# EAGLE board SparkFun_GNSS_Timing-ZED-F9T-Panel (EAGLE 9.6.2), part 1 of 4
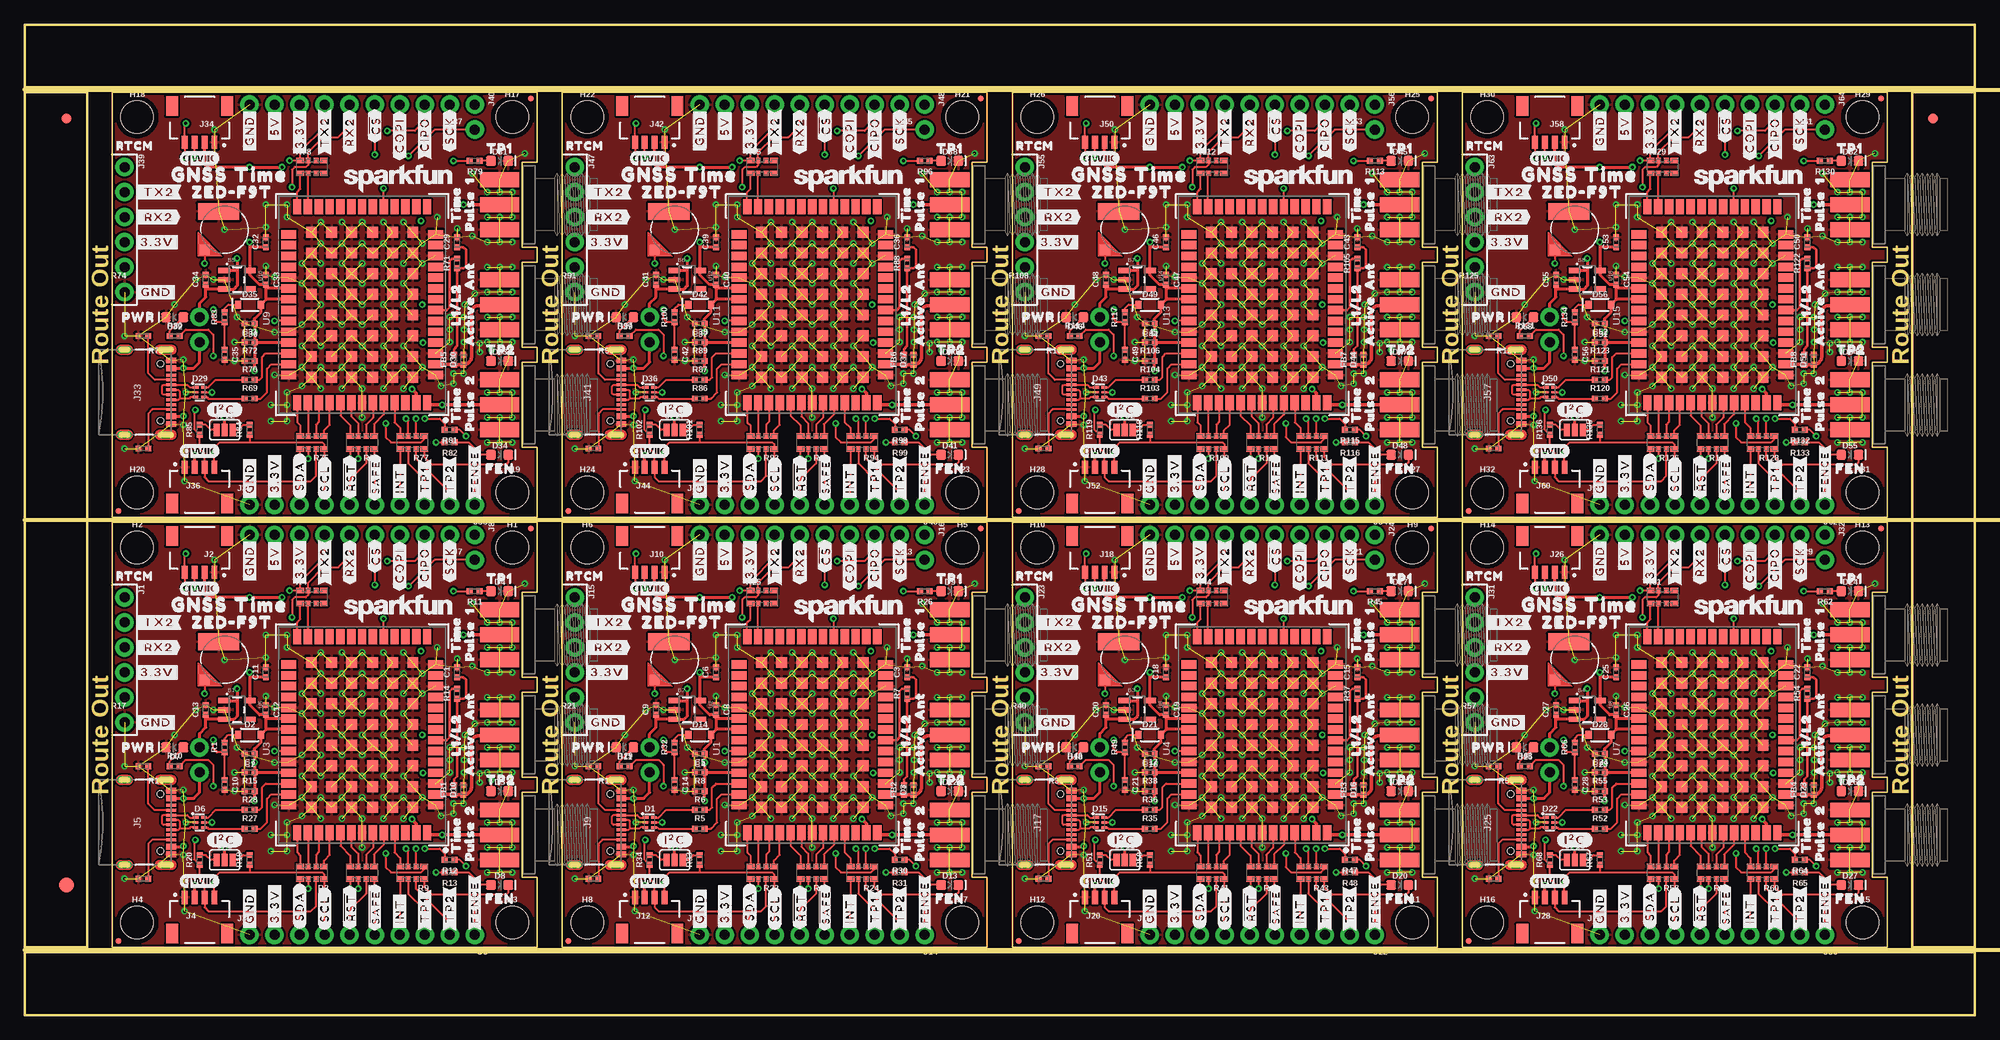
[diagram p0: board, top side]
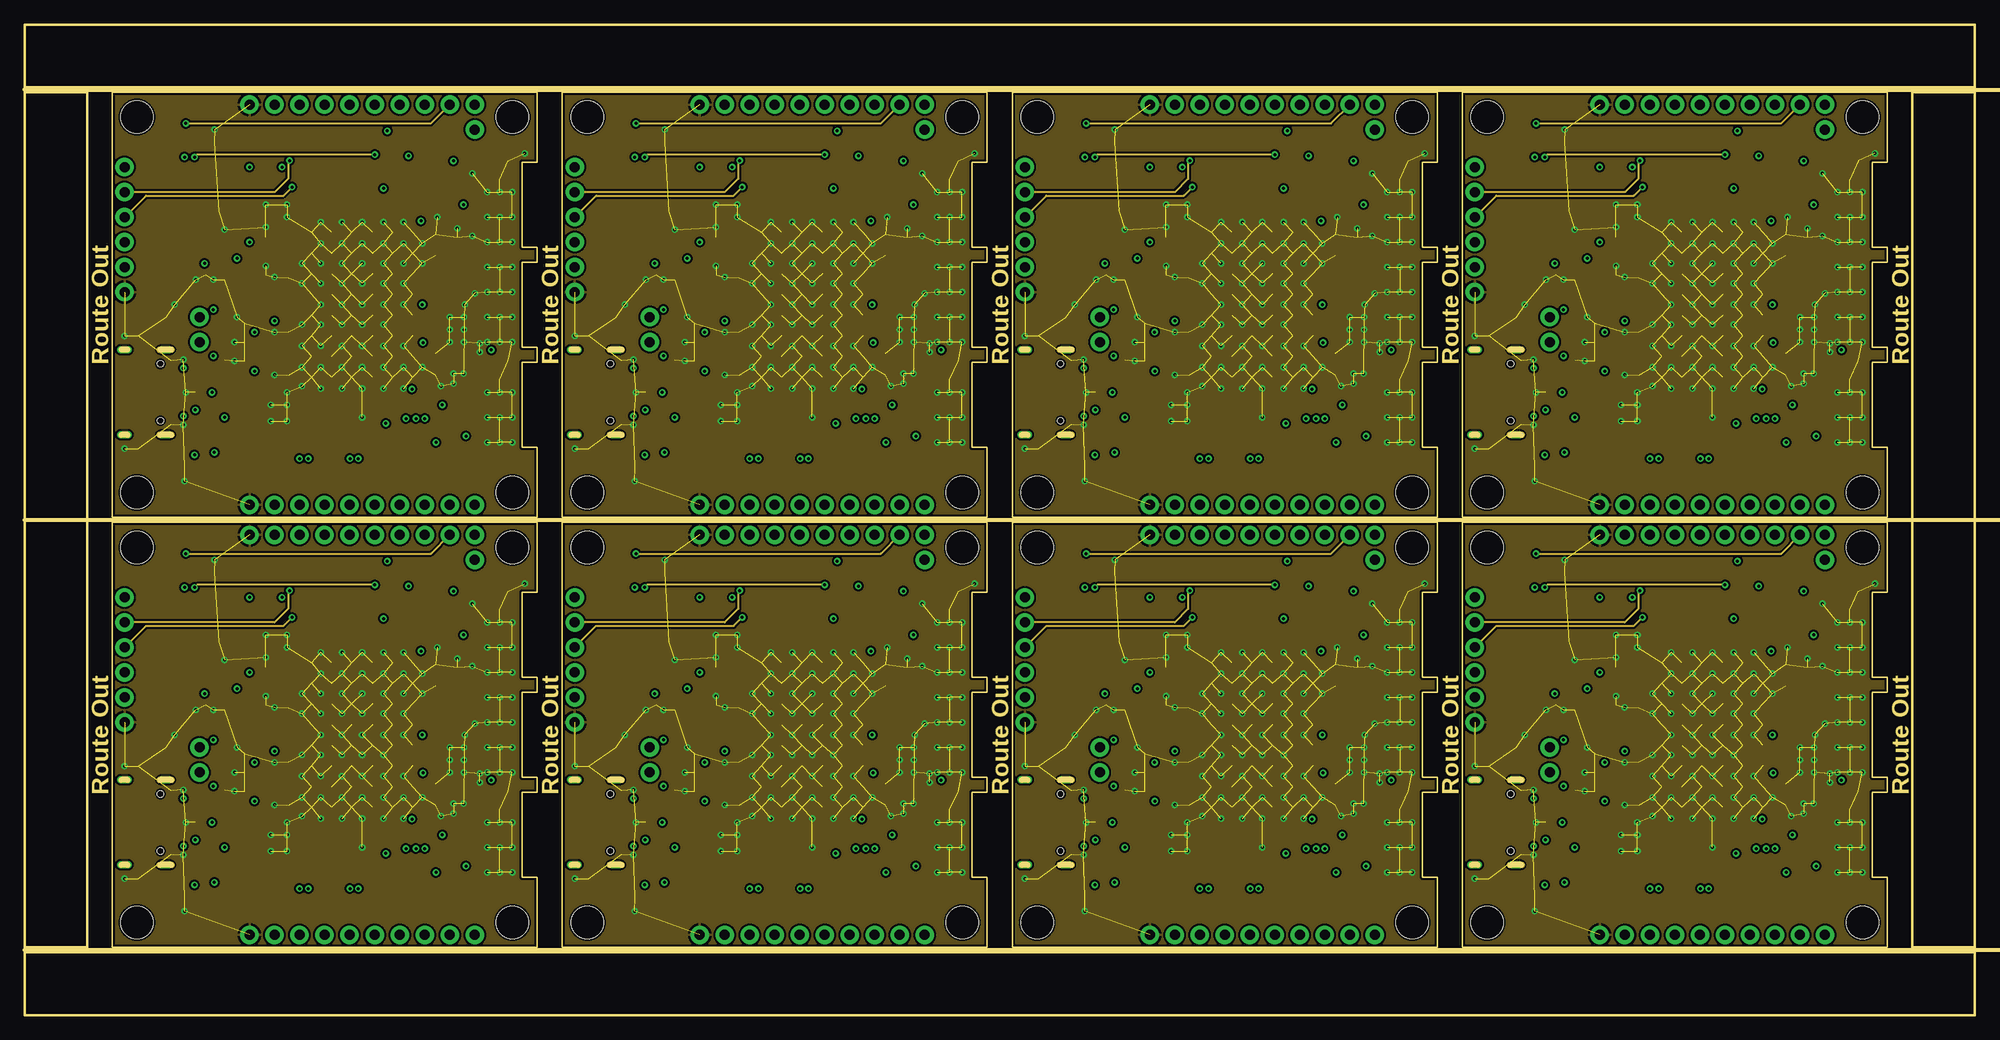
[diagram p1: board, inner layer Route2]
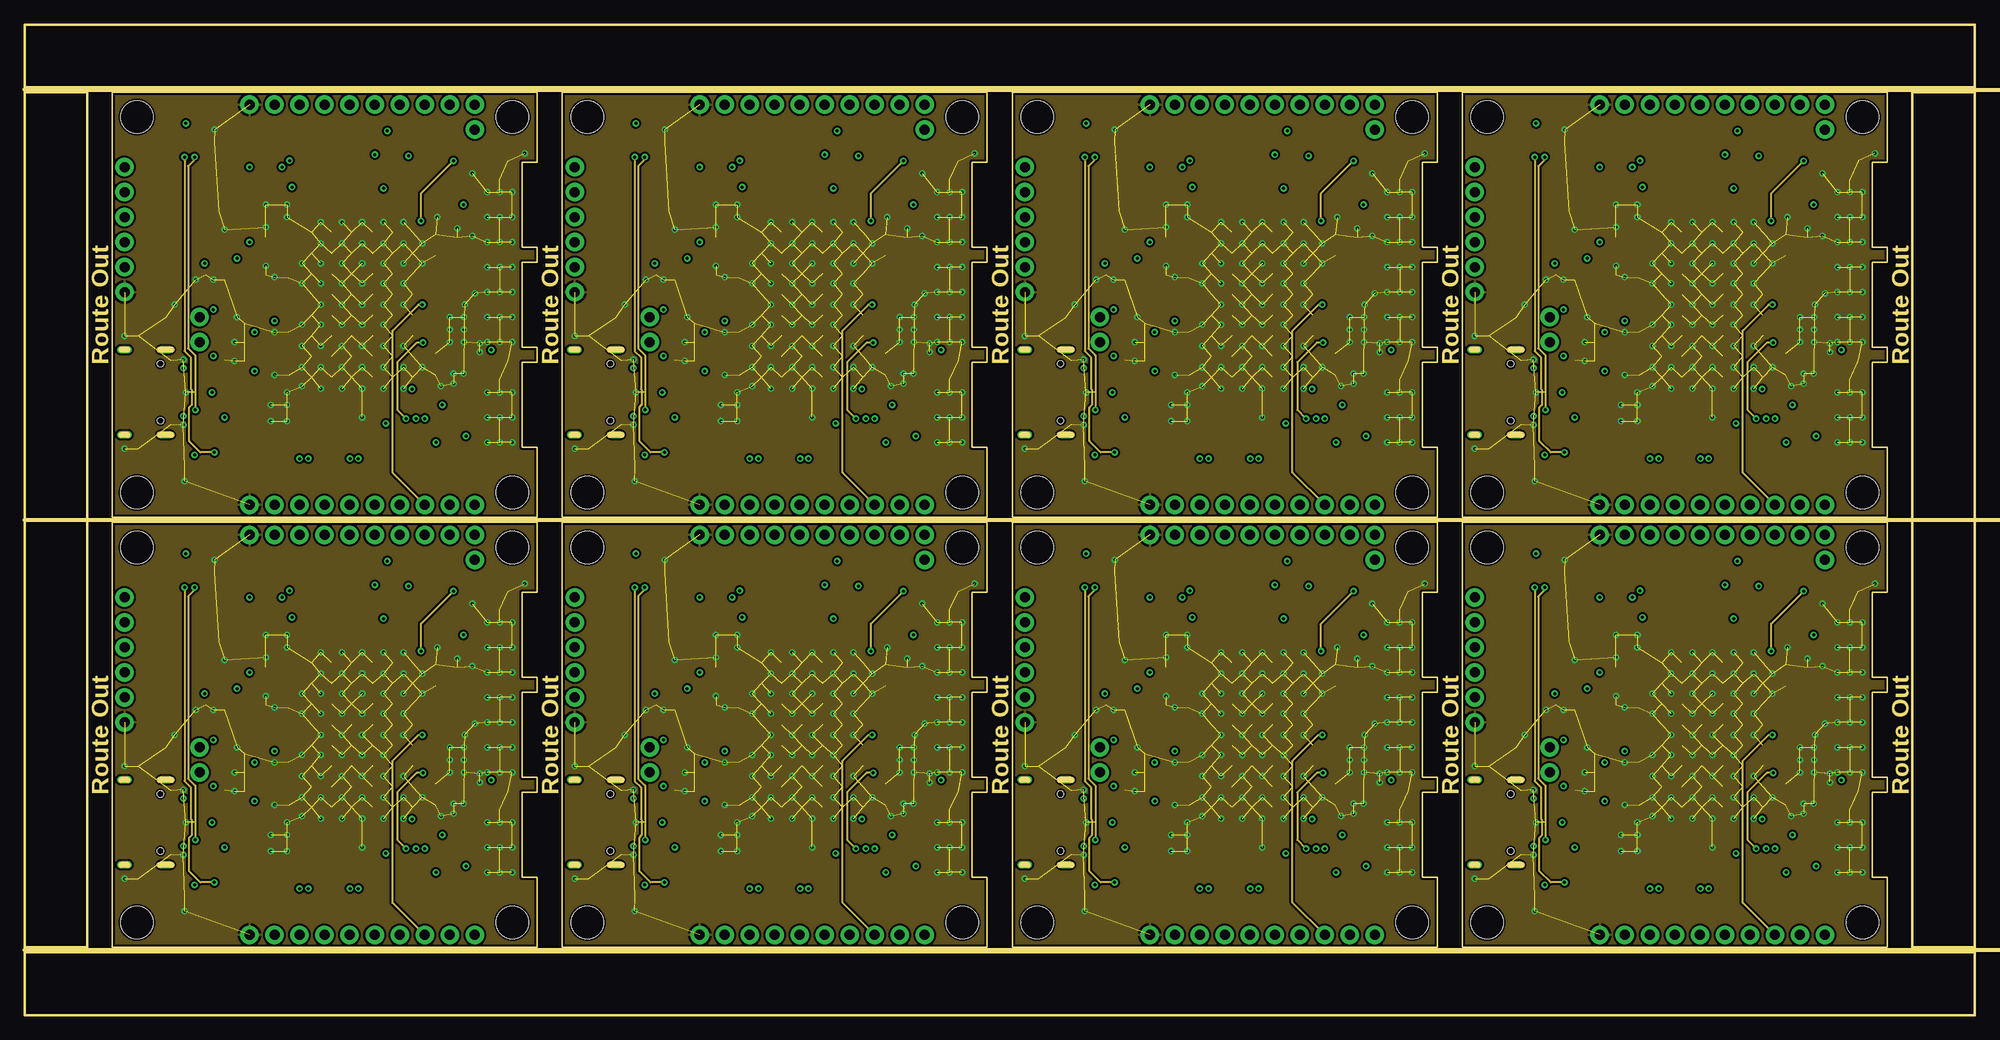
[diagram p2: board, inner layer Route15]
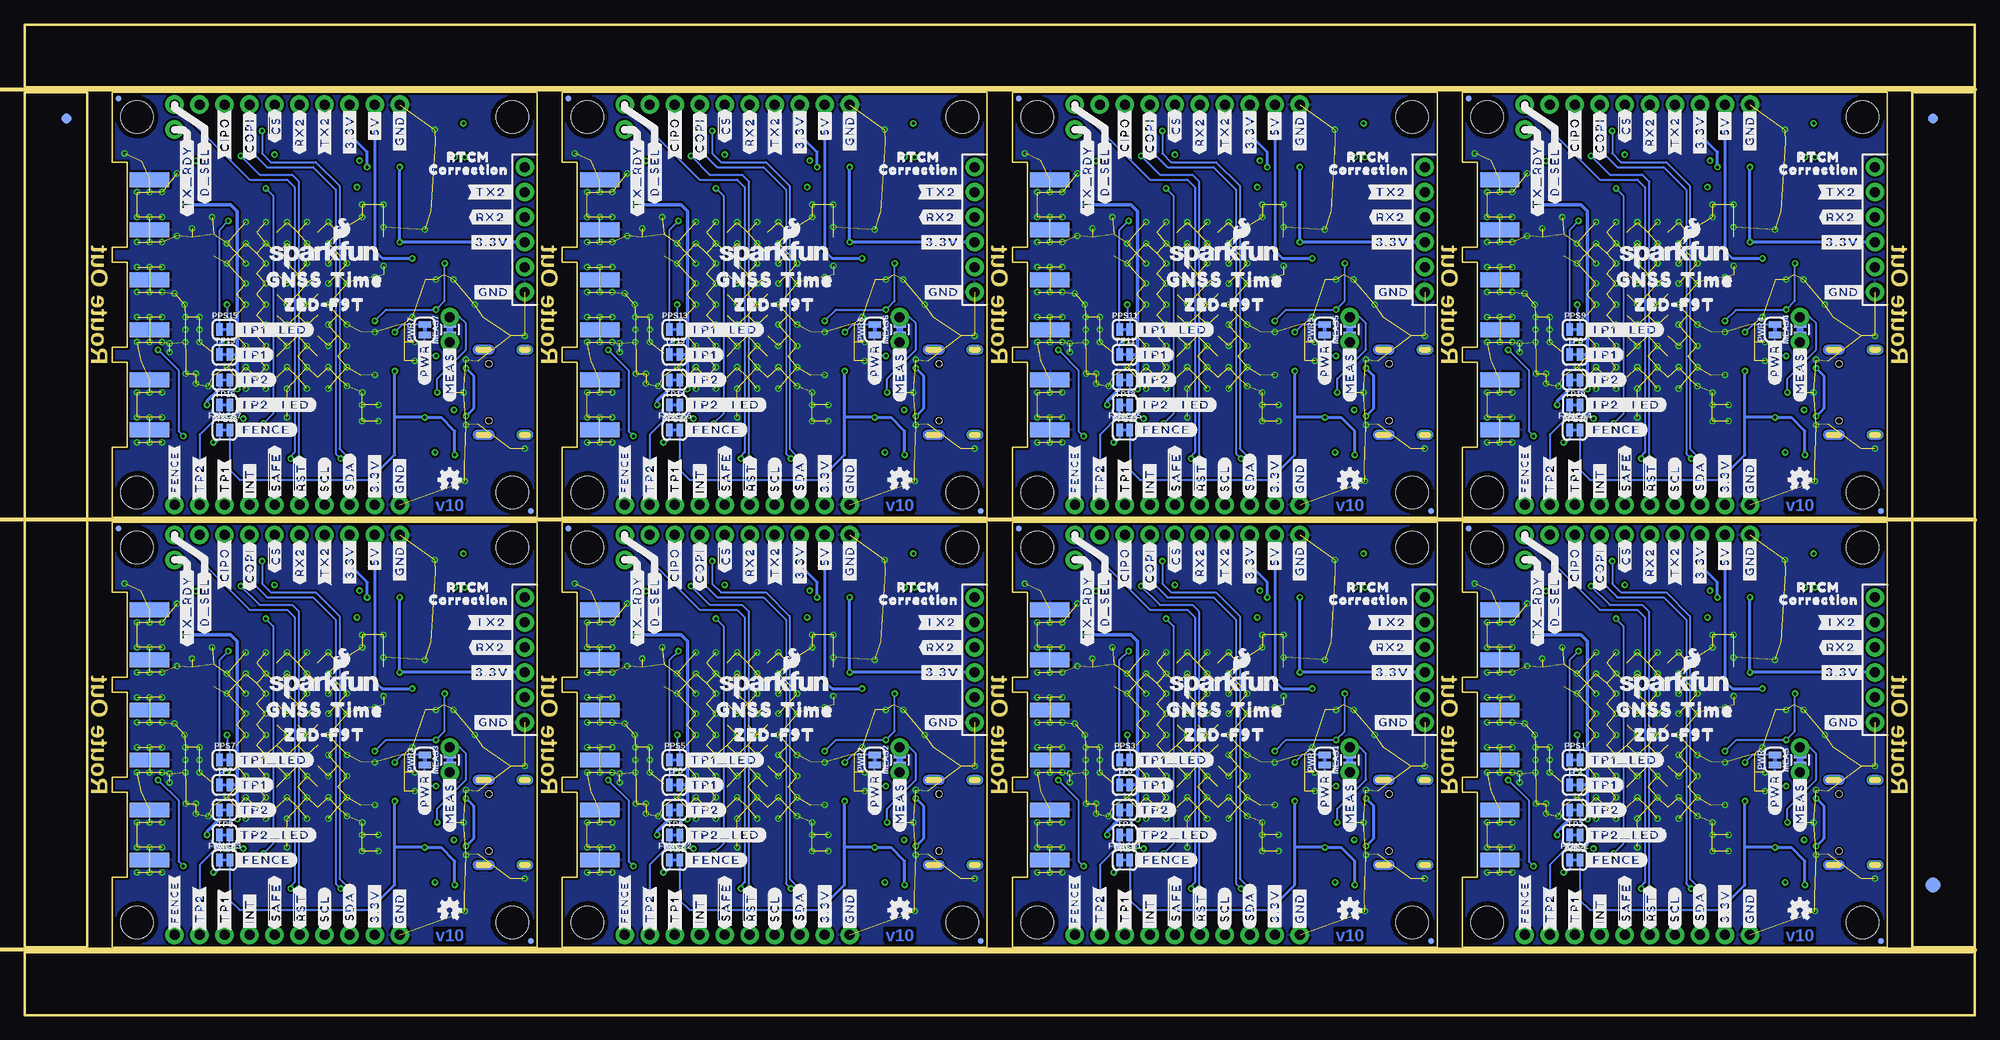
[diagram p3: board, bottom side, seen from below]

Size 198.12 x 100.58 mm. Coordinates in mm from the lower left corner, seen from the top.
Outline: 8.89,6.86 8.89,50.04 52.07,50.04 52.07,42.93 50.55,42.93 50.55,34.29 52.07,34.29 52.07,32.77 50.55,32.77 50.55,24.13 52.07,24.13 52.07,22.61 50.55,22.61 50.55,13.97 52.07,13.97 52.07,6.86 8.89,6.86
Outline: 54.61,6.86 54.61,50.04 97.79,50.04 97.79,42.93 96.27,42.93 96.27,34.29 97.79,34.29 97.79,32.77 96.27,32.77 96.27,24.13 97.79,24.13 97.79,22.61 96.27,22.61 96.27,13.97 97.79,13.97 97.79,6.86 54.61,6.86
Outline: 100.33,6.86 100.33,50.04 143.51,50.04 143.51,42.93 141.99,42.93 141.99,34.29 143.51,34.29 143.51,32.77 141.99,32.77 141.99,24.13 143.51,24.13 143.51,22.61 141.99,22.61 141.99,13.97 143.51,13.97 143.51,6.86 100.33,6.86
Outline: 146.05,6.86 146.05,50.04 189.23,50.04 189.23,42.93 187.71,42.93 187.71,34.29 189.23,34.29 189.23,32.77 187.71,32.77 187.71,24.13 189.23,24.13 189.23,22.61 187.71,22.61 187.71,13.97 189.23,13.97 189.23,6.86 146.05,6.86
Outline: 8.89,50.55 8.89,93.73 52.07,93.73 52.07,86.61 50.55,86.61 50.55,77.98 52.07,77.98 52.07,76.45 50.55,76.45 50.55,67.82 52.07,67.82 52.07,66.29 50.55,66.29 50.55,57.66 52.07,57.66 52.07,50.55 8.89,50.55
Outline: 54.61,50.55 54.61,93.73 97.79,93.73 97.79,86.61 96.27,86.61 96.27,77.98 97.79,77.98 97.79,76.45 96.27,76.45 96.27,67.82 97.79,67.82 97.79,66.29 96.27,66.29 96.27,57.66 97.79,57.66 97.79,50.55 54.61,50.55
Outline: 100.33,50.55 100.33,93.73 143.51,93.73 143.51,86.61 141.99,86.61 141.99,77.98 143.51,77.98 143.51,76.45 141.99,76.45 141.99,67.82 143.51,67.82 143.51,66.29 141.99,66.29 141.99,57.66 143.51,57.66 143.51,50.55 100.33,50.55
Outline: 146.05,50.55 146.05,93.73 189.23,93.73 189.23,86.61 187.71,86.61 187.71,77.98 189.23,77.98 189.23,76.45 187.71,76.45 187.71,67.82 189.23,67.82 189.23,66.29 187.71,66.29 187.71,57.66 189.23,57.66 189.23,50.55 146.05,50.55
Outline: 0,6.35 198.12,6.35 198.12,0 0,0 0,6.35
Outline: 191.77,93.73 198.12,93.73 198.12,6.86 191.77,6.86 191.77,93.73
Outline: 0,100.58 198.12,100.58 198.12,94.23 0,94.23 0,100.58
Outline: 0,93.73 6.35,93.73 6.35,6.86 0,6.86 0,93.73
Copper layers (1+2*15+16): Top 0.035559375mm / dielectric 0.47751875mm / Route2 0.035559375mm / dielectric 0.47751875mm / Route15 0.035559375mm / dielectric 0.47751875mm / Bottom 0.035559375mm
Design rules "SparkFun_GNSS_Timing-ZED-F9T": minimum track width 7mil, minimum drill 12mil, track to track 7mil, track to pad 7mil, pad to pad 7mil, via to via 7mil, smd to smd 7mil, copper to edge 7mil, drill to drill 7mil, minimum pad ring 7mil, minimum via ring 7mil, stop-mask expansion 3mil, vias tented up to drill 25mil, thermal gap 10mil
Net classes: 1 power: width 0.178 mm; 3 RF: width 0.349 mm, clearance 0.203 mm
Milling: 3 lines

## Footprints (pad centres in the part's own frame; a part is rotated, then mirrored left to right if it is on the bottom)
ML414H_IV01E = smd 1 x 1: + 2.022,2.032 | smd 4.2 x 1.7: - 0.6,-1.85
0402-TIGHT = smd 0.6 x 0.6: 1 -0.5,0; 2 0.5,0
SOT886 = smd 0.61 x 0.25: 1 -0.405,0.5 | smd 0.56 x 0.25: 2 -0.43,0; 3 -0.43,-0.5; 4 0.43,-0.5; 5 0.43,0; 6 0.43,0.5
SOD-323 = smd 0.63 x 0.83: A 1.15,0; C -1.15,0
LED-0603 = smd 1 x 1: A -0.877,0; C 0.877,0
SMA-EDGE = smd 1.5 x 4: GND@0 -2.54,0; GND@1 2.54,0; SIG 0,0 | smd 1.5 x 4 bottom: GND@2 -2.54,0; GND@3 2.54,0
FIDUCIAL-1X2 = smd 1 x 1: 1 0,0
FIDUCIAL-1.5X3 = smd 1.5 x 1.5: 1 0,0
SMT-JUMPER_2_NC_TRACE_SILK = smd 0.66 x 1.27: 1 -0.521,0; 2 0.521,0
STAND-OFF = hole 3.302: 0,0
1X06_NO_SILK = drill 1.016 pad 1.88: 1 0,0; 2 2.54,0; 3 5.08,0; 4 7.62,0; 5 10.16,0; 6 12.7,0
JST04_1MM_RA = smd 0.6 x 1.35: 1 -1.5,0; 2 -0.5,0; 3 0.5,0; 4 1.5,0 | smd 1.2 x 2: NC1 2.8,-3.675; NC2 -2.8,-3.675
1X04_NO_SILK = drill 1.016 pad 1.88: 1 0,0; 2 2.54,0; 3 5.08,0; 4 7.62,0
USB-C-16P_4LAYER-PADS = smd 0.3 x 1: A5 -1.25,-0.34; A6 -0.25,-0.34; A7 0.25,-0.34; A8 1.25,-0.34; B5 1.75,-0.34; B6 0.75,-0.34; B7 -0.75,-0.34; B8 -1.75,-0.34 | smd 0.6 x 1: GND -3.225,-0.34; GND2 3.225,-0.34; VBUS1 -2.45,-0.34; VBUS2 2.45,-0.34 | drill 0.4 pad 0.6 long: SHLD1 -4.318,-0.915; SHLD2 4.318,-0.915; SHLD3 -4.318,-5.095; SHLD4 4.318,-5.095 | hole 0.65: -2.89,-1.445; 2.89,-1.445
1X09_NO_SILK = drill 1.016 pad 1.88: 1 0,0; 2 2.54,0; 3 5.08,0; 4 7.62,0; 5 10.16,0; 6 12.7,0; 7 15.24,0; 8 17.78,0; 9 20.32,0
1X02_NO_SILK = drill 1.016 pad 1.88: 1 0,0; 2 2.54,0
FIDUCIAL-MICRO = smd 0.635 x 0.635: 1 0,0
SMT-JUMPER_3_NO_SILK = smd 0.635 x 1.27: 1 -0.813,0; 2 0,0; 3 0.813,0
COMBO-JUMPER_2_NC_TRACE = smd 0.635 x 1.27: 1 -0.508,0; 2 0.508,0 | drill 1.016 pad 1.88: 3 -1.27,0; 4 1.27,0
1206_RA = smd 0.8 x 0.55: P1 -1.2,-0.62; P4 1.2,-0.62; P5 1.2,0.68; P8 -1.2,0.68 | smd 0.5 x 0.55: P2 -0.4,-0.62; P3 0.4,-0.62; P6 0.4,0.68; P7 -0.4,0.68
ZED-F9X = smd 0.85 x 1.52: 1 -7.15,-7.45; 2 -6.05,-7.45; 3 -4.95,-7.45; 4 -3.85,-7.45; 5 -2.75,-7.45; 6 -1.65,-7.45; 7 -0.55,-7.45; 8 0.55,-7.45; 9 1.65,-7.45; 10 2.75,-7.45; 11 3.85,-7.45; 12 4.95,-7.45; 13 6.05,-7.45; 14 7.15,-7.45; 28 7.15,7.45; 29 6.05,7.45; 30 4.95,7.45; 31 3.85,7.45; 32 2.75,7.45; 33 1.65,7.45; 34 0.55,7.45; 35 -0.55,7.45; 36 -1.65,7.45; 37 -2.75,7.45; 38 -3.85,7.45; 39 -4.95,7.45; 40 -6.05,7.45; 41 -7.15,7.45 | smd 1.52 x 0.85: 15 9.95,-6.6; 16 9.95,-5.5; 17 9.95,-4.4; 18 9.95,-3.3; 19 9.95,-2.2; 20 9.95,-1.1; 21 9.95,0; 22 9.95,1.1; 23 9.95,2.2; 24 9.95,3.3; 25 9.95,4.4; 26 9.95,5.5; 27 9.95,6.6; 42 -9.95,6.6; 43 -9.95,5.5; 44 -9.95,4.4; 45 -9.95,3.3; 46 -9.95,2.2; 47 -9.95,1.1; 48 -9.95,0; 49 -9.95,-1.1; 50 -9.95,-2.2; 51 -9.95,-3.3; 52 -9.95,-4.4; 53 -9.95,-5.5; 54 -9.95,-6.6 | smd 1.1 x 1.1: G1 -7.35,-5.15; G2 -5.25,-5.15; G3 -3.15,-5.15; G4 -1.05,-5.15; G5 1.05,-5.15; G6 3.15,-5.15; G7 5.25,-5.15; G8 7.35,-5.15; G9 7.35,-3.1; G10 5.25,-3.1; G11 3.15,-3.1; G12 1.05,-3.1; G13 -1.05,-3.1; G14 -3.15,-3.1; G15 -5.25,-3.1; G16 -7.35,-3.1; G17 -7.35,-1.05; G18 -5.25,-1.05; G19 -3.15,-1.05; G20 -1.05,-1.05; G21 1.05,-1.05; G22 3.15,-1.05; G23 5.25,-1.05; G24 7.35,-1.05; G25 7.35,1.05; G26 5.25,1.05; G27 3.15,1.05; G28 1.05,1.05; G29 -1.05,1.05; G30 -3.15,1.05; G31 -5.25,1.05; G32 -7.35,1.05; G33 -7.35,3.1; G34 -5.25,3.1; G35 -3.15,3.1; G36 -1.05,3.1; G37 1.05,3.1; G38 3.15,3.1; G39 5.25,3.1; G40 7.35,3.1; G41 7.35,5.15; G42 5.25,5.15; G43 3.15,5.15; G44 1.05,5.15; G45 -1.05,5.15; G46 -3.15,5.15; G47 -5.25,5.15; G48 -7.35,5.15
SOT23-5 = smd 0.55 x 1.2: 1 -0.95,-1.3; 2 0,-1.3; 3 0.95,-1.3; 4 0.95,1.3; 5 -0.95,1.3

## Placement (x,y rotation side)
B1  6.8MM_COIN_CELL  [ML414H_IV01E]  20.32,36.07 180 top
B2  6.8MM_COIN_CELL  [ML414H_IV01E]  66.04,36.07 180 top
B3  6.8MM_COIN_CELL  [ML414H_IV01E]  111.76,36.07 180 top
B4  6.8MM_COIN_CELL  [ML414H_IV01E]  157.48,36.07 180 top
B5  6.8MM_COIN_CELL  [ML414H_IV01E]  20.32,79.76 180 top
B6  6.8MM_COIN_CELL  [ML414H_IV01E]  66.04,79.76 180 top
B7  6.8MM_COIN_CELL  [ML414H_IV01E]  111.76,79.76 180 top
B8  6.8MM_COIN_CELL  [ML414H_IV01E]  157.48,79.76 180 top
C1  47pF  [0402-TIGHT]  43.94,34.8 90 top
C2  1.0uF  [0402-TIGHT]  22.86,26.54 180 top
C3  47pF  [0402-TIGHT]  89.66,34.8 90 top
C4  1.0uF  [0402-TIGHT]  68.58,26.54 180 top
C5  0.1uF  [0402-TIGHT]  68.58,24.64 0 top
C6  1.0uF  [0402-TIGHT]  70.23,34.8 90 top
C7  0.1uF  [0402-TIGHT]  22.86,24.64 0 top
C8  0.1uF  [0402-TIGHT]  70.23,30.99 270 top
C9  1.0uF  [0402-TIGHT]  64.13,30.99 90 top
C10  1.0uF  [0402-TIGHT]  20.32,23.37 270 top
C11  1.0uF  [0402-TIGHT]  24.51,34.8 90 top
C12  0.1uF  [0402-TIGHT]  24.51,30.99 270 top
C13  1.0uF  [0402-TIGHT]  18.41,30.99 90 top
C14  1.0uF  [0402-TIGHT]  66.04,23.37 270 top
C15  47pF  [0402-TIGHT]  135.38,34.8 90 top
C16  1.0uF  [0402-TIGHT]  114.3,26.54 180 top
C17  0.1uF  [0402-TIGHT]  114.3,24.64 0 top
C18  1.0uF  [0402-TIGHT]  115.95,34.8 90 top
C19  0.1uF  [0402-TIGHT]  115.95,30.99 270 top
C20  1.0uF  [0402-TIGHT]  109.86,30.99 90 top
C21  1.0uF  [0402-TIGHT]  111.76,23.37 270 top
C22  47pF  [0402-TIGHT]  181.1,34.8 90 top
C23  1.0uF  [0402-TIGHT]  160.02,26.54 180 top
C24  0.1uF  [0402-TIGHT]  160.02,24.64 0 top
C25  1.0uF  [0402-TIGHT]  161.67,34.8 90 top
C26  0.1uF  [0402-TIGHT]  161.67,30.99 270 top
C27  1.0uF  [0402-TIGHT]  155.57,30.99 90 top
C28  1.0uF  [0402-TIGHT]  157.48,23.37 270 top
C29  47pF  [0402-TIGHT]  43.94,78.49 90 top
C30  1.0uF  [0402-TIGHT]  22.86,70.23 180 top
C31  0.1uF  [0402-TIGHT]  22.86,68.33 0 top
C32  1.0uF  [0402-TIGHT]  24.51,78.49 90 top
C33  0.1uF  [0402-TIGHT]  24.51,74.68 270 top
C34  1.0uF  [0402-TIGHT]  18.41,74.68 90 top
C35  1.0uF  [0402-TIGHT]  20.32,67.06 270 top
C36  47pF  [0402-TIGHT]  89.66,78.49 90 top
C37  1.0uF  [0402-TIGHT]  68.58,70.23 180 top
C38  0.1uF  [0402-TIGHT]  68.58,68.33 0 top
C39  1.0uF  [0402-TIGHT]  70.23,78.49 90 top
C40  0.1uF  [0402-TIGHT]  70.23,74.68 270 top
C41  1.0uF  [0402-TIGHT]  64.13,74.68 90 top
C42  1.0uF  [0402-TIGHT]  66.04,67.06 270 top
C43  47pF  [0402-TIGHT]  135.38,78.49 90 top
C44  1.0uF  [0402-TIGHT]  114.3,70.23 180 top
C45  0.1uF  [0402-TIGHT]  114.3,68.33 0 top
C46  1.0uF  [0402-TIGHT]  115.95,78.49 90 top
C47  0.1uF  [0402-TIGHT]  115.95,74.68 270 top
C48  1.0uF  [0402-TIGHT]  109.86,74.68 90 top
C49  1.0uF  [0402-TIGHT]  111.76,67.06 270 top
C50  47pF  [0402-TIGHT]  181.1,78.49 90 top
C51  1.0uF  [0402-TIGHT]  160.02,70.23 180 top
C52  0.1uF  [0402-TIGHT]  160.02,68.33 0 top
C53  1.0uF  [0402-TIGHT]  161.67,78.49 90 top
C54  0.1uF  [0402-TIGHT]  161.67,74.68 270 top
C55  1.0uF  [0402-TIGHT]  155.57,74.68 90 top
C56  1.0uF  [0402-TIGHT]  157.48,67.06 270 top
D1  PRTR5V0U2F  [SOT886]  63.5,19.56 0 top
D2  0.5A/40V/420mV  [SOD-323]  22.86,28.45 0 top
D3  PESD0402-0402T  [0402-TIGHT]  90.3,22.86 90 top
D4  YEL  [LED-0603]  48.26,43.05 0 top
D5  GRN  [LED-0603]  48.26,22.73 0 top
D6  PRTR5V0U2F  [SOT886]  17.78,19.56 0 top
D7  RED  [LED-0603]  15.24,27.18 180 top
D8  BLU  [LED-0603]  48.26,13.21 0 top
D9  YEL  [LED-0603]  93.98,43.05 0 top
D10  PESD0402-0402T  [0402-TIGHT]  44.58,22.86 90 top
D11  RED  [LED-0603]  60.96,27.18 180 top
D12  GRN  [LED-0603]  93.98,22.73 0 top
D13  BLU  [LED-0603]  93.98,13.21 0 top
D14  0.5A/40V/420mV  [SOD-323]  68.58,28.45 0 top
D15  PRTR5V0U2F  [SOT886]  109.22,19.56 0 top
D16  PESD0402-0402T  [0402-TIGHT]  136.02,22.86 90 top
D17  YEL  [LED-0603]  139.7,43.05 0 top
D18  RED  [LED-0603]  106.68,27.18 180 top
D19  GRN  [LED-0603]  139.7,22.73 0 top
D20  BLU  [LED-0603]  139.7,13.21 0 top
D21  0.5A/40V/420mV  [SOD-323]  114.3,28.45 0 top
D22  PRTR5V0U2F  [SOT886]  154.94,19.56 0 top
D23  PESD0402-0402T  [0402-TIGHT]  181.74,22.86 90 top
D24  YEL  [LED-0603]  185.42,43.05 0 top
D25  RED  [LED-0603]  152.4,27.18 180 top
D26  GRN  [LED-0603]  185.42,22.73 0 top
D27  BLU  [LED-0603]  185.42,13.21 0 top
D28  0.5A/40V/420mV  [SOD-323]  160.02,28.45 0 top
D29  PRTR5V0U2F  [SOT886]  17.78,63.25 0 top
D30  PESD0402-0402T  [0402-TIGHT]  44.58,66.55 90 top
D31  YEL  [LED-0603]  48.26,86.74 0 top
D32  RED  [LED-0603]  15.24,70.87 180 top
D33  GRN  [LED-0603]  48.26,66.42 0 top
D34  BLU  [LED-0603]  48.26,56.9 0 top
D35  0.5A/40V/420mV  [SOD-323]  22.86,72.14 0 top
D36  PRTR5V0U2F  [SOT886]  63.5,63.25 0 top
D37  PESD0402-0402T  [0402-TIGHT]  90.3,66.55 90 top
D38  YEL  [LED-0603]  93.98,86.74 0 top
D39  RED  [LED-0603]  60.96,70.87 180 top
D40  GRN  [LED-0603]  93.98,66.42 0 top
D41  BLU  [LED-0603]  93.98,56.9 0 top
D42  0.5A/40V/420mV  [SOD-323]  68.58,72.14 0 top
D43  PRTR5V0U2F  [SOT886]  109.22,63.25 0 top
D44  PESD0402-0402T  [0402-TIGHT]  136.02,66.55 90 top
D45  YEL  [LED-0603]  139.7,86.74 0 top
D46  RED  [LED-0603]  106.68,70.87 180 top
D47  GRN  [LED-0603]  139.7,66.42 0 top
D48  BLU  [LED-0603]  139.7,56.9 0 top
D49  0.5A/40V/420mV  [SOD-323]  114.3,72.14 0 top
D50  PRTR5V0U2F  [SOT886]  154.94,63.25 0 top
D51  PESD0402-0402T  [0402-TIGHT]  181.74,66.55 90 top
D52  YEL  [LED-0603]  185.42,86.74 0 top
D53  RED  [LED-0603]  152.4,70.87 180 top
D54  GRN  [LED-0603]  185.42,66.42 0 top
D55  BLU  [LED-0603]  185.42,56.9 0 top
D56  0.5A/40V/420mV  [SOD-323]  160.02,72.14 0 top
E1  SMA  [SMA-EDGE]  48.26,28.45 270 top
E2  SMA  [SMA-EDGE]  48.26,38.61 270 top
E3  SMA  [SMA-EDGE]  48.26,18.29 270 top
E4  SMA  [SMA-EDGE]  93.98,28.45 270 top
E5  SMA  [SMA-EDGE]  93.98,38.61 270 top
E6  SMA  [SMA-EDGE]  93.98,18.29 270 top
E7  SMA  [SMA-EDGE]  139.7,28.45 270 top
E8  SMA  [SMA-EDGE]  139.7,38.61 270 top
E9  SMA  [SMA-EDGE]  139.7,18.29 270 top
E10  SMA  [SMA-EDGE]  185.42,28.45 270 top
E11  SMA  [SMA-EDGE]  185.42,38.61 270 top
E12  SMA  [SMA-EDGE]  185.42,18.29 270 top
E13  SMA  [SMA-EDGE]  48.26,72.14 270 top
E14  SMA  [SMA-EDGE]  48.26,82.3 270 top
E15  SMA  [SMA-EDGE]  48.26,61.98 270 top
E16  SMA  [SMA-EDGE]  93.98,72.14 270 top
E17  SMA  [SMA-EDGE]  93.98,82.3 270 top
E18  SMA  [SMA-EDGE]  93.98,61.98 270 top
E19  SMA  [SMA-EDGE]  139.7,72.14 270 top
E20  SMA  [SMA-EDGE]  139.7,82.3 270 top
E21  SMA  [SMA-EDGE]  139.7,61.98 270 top
E22  SMA  [SMA-EDGE]  185.42,72.14 270 top
E23  SMA  [SMA-EDGE]  185.42,82.3 270 top
E24  SMA  [SMA-EDGE]  185.42,61.98 270 top
E$1  [FIDUCIAL-1X2]  4.23,91.06 0 top
E$2  [FIDUCIAL-1X2]  4.23,91.06 0 bottom
E$3  [FIDUCIAL-1X2]  193.89,91.06 0 top
E$4  [FIDUCIAL-1X2]  193.89,91.06 0 bottom
E$5  [FIDUCIAL-1.5X3]  4.23,13.21 0 top
E$6  [FIDUCIAL-1.5X3]  4.23,13.21 0 bottom
FB1  2.66Ω  [0402-TIGHT]  43.62,22.86 90 top
FB2  2.66Ω  [0402-TIGHT]  89.33,22.86 90 top
FB3  2.66Ω  [0402-TIGHT]  135.06,22.86 90 top
FB4  2.66Ω  [0402-TIGHT]  180.77,22.86 90 top
FB5  2.66Ω  [0402-TIGHT]  43.62,66.55 90 top
FB6  2.66Ω  [0402-TIGHT]  89.33,66.55 90 top
FB7  2.66Ω  [0402-TIGHT]  135.06,66.55 90 top
FB8  2.66Ω  [0402-TIGHT]  180.77,66.55 90 top
FENCE  JUMPER-SMT_2_NC_TRACE_SILK  [SMT-JUMPER_2_NC_TRACE_SILK]  40.64,15.75 0 bottom
FENCE1  JUMPER-SMT_2_NC_TRACE_SILK  [SMT-JUMPER_2_NC_TRACE_SILK]  86.36,15.75 0 bottom
FENCE2  JUMPER-SMT_2_NC_TRACE_SILK  [SMT-JUMPER_2_NC_TRACE_SILK]  132.08,15.75 0 bottom
FENCE3  JUMPER-SMT_2_NC_TRACE_SILK  [SMT-JUMPER_2_NC_TRACE_SILK]  177.8,15.75 0 bottom
FENCE4  JUMPER-SMT_2_NC_TRACE_SILK  [SMT-JUMPER_2_NC_TRACE_SILK]  40.64,59.44 0 bottom
FENCE5  JUMPER-SMT_2_NC_TRACE_SILK  [SMT-JUMPER_2_NC_TRACE_SILK]  86.36,59.44 0 bottom
FENCE6  JUMPER-SMT_2_NC_TRACE_SILK  [SMT-JUMPER_2_NC_TRACE_SILK]  132.08,59.44 0 bottom
FENCE7  JUMPER-SMT_2_NC_TRACE_SILK  [SMT-JUMPER_2_NC_TRACE_SILK]  177.8,59.44 0 bottom
H1  STAND-OFF  [STAND-OFF]  49.53,47.5 0 top
H2  STAND-OFF  [STAND-OFF]  11.43,47.5 0 top
H3  STAND-OFF  [STAND-OFF]  49.53,9.4 0 top
H4  STAND-OFF  [STAND-OFF]  11.43,9.4 0 top
H5  STAND-OFF  [STAND-OFF]  95.25,47.5 0 top
H6  STAND-OFF  [STAND-OFF]  57.15,47.5 0 top
H7  STAND-OFF  [STAND-OFF]  95.25,9.4 0 top
H8  STAND-OFF  [STAND-OFF]  57.15,9.4 0 top
H9  STAND-OFF  [STAND-OFF]  140.97,47.5 0 top
H10  STAND-OFF  [STAND-OFF]  102.87,47.5 0 top
H11  STAND-OFF  [STAND-OFF]  140.97,9.4 0 top
H12  STAND-OFF  [STAND-OFF]  102.87,9.4 0 top
H13  STAND-OFF  [STAND-OFF]  186.69,47.5 0 top
H14  STAND-OFF  [STAND-OFF]  148.59,47.5 0 top
H15  STAND-OFF  [STAND-OFF]  186.69,9.4 0 top
H16  STAND-OFF  [STAND-OFF]  148.59,9.4 0 top
H17  STAND-OFF  [STAND-OFF]  49.53,91.19 0 top
H18  STAND-OFF  [STAND-OFF]  11.43,91.19 0 top
H19  STAND-OFF  [STAND-OFF]  49.53,53.09 0 top
H20  STAND-OFF  [STAND-OFF]  11.43,53.09 0 top
H21  STAND-OFF  [STAND-OFF]  95.25,91.19 0 top
H22  STAND-OFF  [STAND-OFF]  57.15,91.19 0 top
H23  STAND-OFF  [STAND-OFF]  95.25,53.09 0 top
H24  STAND-OFF  [STAND-OFF]  57.15,53.09 0 top
H25  STAND-OFF  [STAND-OFF]  140.97,91.19 0 top
H26  STAND-OFF  [STAND-OFF]  102.87,91.19 0 top
H27  STAND-OFF  [STAND-OFF]  140.97,53.09 0 top
H28  STAND-OFF  [STAND-OFF]  102.87,53.09 0 top
H29  STAND-OFF  [STAND-OFF]  186.69,91.19 0 top
H30  STAND-OFF  [STAND-OFF]  148.59,91.19 0 top
H31  STAND-OFF  [STAND-OFF]  186.69,53.09 0 top
H32  STAND-OFF  [STAND-OFF]  148.59,53.09 0 top
J1  Radio  [1X06_NO_SILK]  10.16,42.42 270 top
J2  Qwiic Right Angle  [JST04_1MM_RA]  17.78,44.96 180 top
J3  PTH  [1X04_NO_SILK]  22.86,8.13 0 top
J4  Qwiic Right Angle  [JST04_1MM_RA]  17.78,11.94 0 top
J5  USB Female Type C Connector  [USB-C-16P_4LAYER-PADS]  15.24,19.56 270 top
J6  [1X06_NO_SILK]  45.72,8.13 180 top
J7  [1X09_NO_SILK]  43.18,48.77 180 top
J8  [1X02_NO_SILK]  45.72,48.77 270 top
J9  USB Female Type C Connector  [USB-C-16P_4LAYER-PADS]  60.96,19.56 270 top
J10  Qwiic Right Angle  [JST04_1MM_RA]  63.5,44.96 180 top
J11  PTH  [1X04_NO_SILK]  68.58,8.13 0 top
J12  Qwiic Right Angle  [JST04_1MM_RA]  63.5,11.94 0 top
J13  [1X09_NO_SILK]  88.9,48.77 180 top
J14  [1X06_NO_SILK]  91.44,8.13 180 top
J15  Radio  [1X06_NO_SILK]  55.88,42.42 270 top
J16  [1X02_NO_SILK]  91.44,48.77 270 top
J17  USB Female Type C Connector  [USB-C-16P_4LAYER-PADS]  106.68,19.56 270 top
J18  Qwiic Right Angle  [JST04_1MM_RA]  109.22,44.96 180 top
J19  PTH  [1X04_NO_SILK]  114.3,8.13 0 top
J20  Qwiic Right Angle  [JST04_1MM_RA]  109.22,11.94 0 top
J21  [1X09_NO_SILK]  134.62,48.77 180 top
J22  [1X06_NO_SILK]  137.16,8.13 180 top
J23  Radio  [1X06_NO_SILK]  101.6,42.42 270 top
J24  [1X02_NO_SILK]  137.16,48.77 270 top
J25  USB Female Type C Connector  [USB-C-16P_4LAYER-PADS]  152.4,19.56 270 top
J26  Qwiic Right Angle  [JST04_1MM_RA]  154.94,44.96 180 top
J27  PTH  [1X04_NO_SILK]  160.02,8.13 0 top
J28  Qwiic Right Angle  [JST04_1MM_RA]  154.94,11.94 0 top
J29  [1X09_NO_SILK]  180.34,48.77 180 top
J30  [1X06_NO_SILK]  182.88,8.13 180 top
J31  Radio  [1X06_NO_SILK]  147.32,42.42 270 top
J32  [1X02_NO_SILK]  182.88,48.77 270 top
J33  USB Female Type C Connector  [USB-C-16P_4LAYER-PADS]  15.24,63.25 270 top
J34  Qwiic Right Angle  [JST04_1MM_RA]  17.78,88.65 180 top
J35  PTH  [1X04_NO_SILK]  22.86,51.82 0 top
J36  Qwiic Right Angle  [JST04_1MM_RA]  17.78,55.63 0 top
J37  [1X09_NO_SILK]  43.18,92.46 180 top
J38  [1X06_NO_SILK]  45.72,51.82 180 top
J39  Radio  [1X06_NO_SILK]  10.16,86.11 270 top
J40  [1X02_NO_SILK]  45.72,92.46 270 top
J41  USB Female Type C Connector  [USB-C-16P_4LAYER-PADS]  60.96,63.25 270 top
J42  Qwiic Right Angle  [JST04_1MM_RA]  63.5,88.65 180 top
J43  PTH  [1X04_NO_SILK]  68.58,51.82 0 top
J44  Qwiic Right Angle  [JST04_1MM_RA]  63.5,55.63 0 top
J45  [1X09_NO_SILK]  88.9,92.46 180 top
J46  [1X06_NO_SILK]  91.44,51.82 180 top
J47  Radio  [1X06_NO_SILK]  55.88,86.11 270 top
J48  [1X02_NO_SILK]  91.44,92.46 270 top
J49  USB Female Type C Connector  [USB-C-16P_4LAYER-PADS]  106.68,63.25 270 top
J50  Qwiic Right Angle  [JST04_1MM_RA]  109.22,88.65 180 top
J51  PTH  [1X04_NO_SILK]  114.3,51.82 0 top
J52  Qwiic Right Angle  [JST04_1MM_RA]  109.22,55.63 0 top
J53  [1X09_NO_SILK]  134.62,92.46 180 top
J54  [1X06_NO_SILK]  137.16,51.82 180 top
J55  Radio  [1X06_NO_SILK]  101.6,86.11 270 top
J56  [1X02_NO_SILK]  137.16,92.46 270 top
J57  USB Female Type C Connector  [USB-C-16P_4LAYER-PADS]  152.4,63.25 270 top
J58  Qwiic Right Angle  [JST04_1MM_RA]  154.94,88.65 180 top
J59  PTH  [1X04_NO_SILK]  160.02,51.82 0 top
J60  Qwiic Right Angle  [JST04_1MM_RA]  154.94,55.63 0 top
J61  [1X09_NO_SILK]  180.34,92.46 180 top
J62  [1X06_NO_SILK]  182.88,51.82 180 top
J63  Radio  [1X06_NO_SILK]  147.32,86.11 270 top
J64  [1X02_NO_SILK]  182.88,92.46 270 top
JP1  FIDUCIALUFIDUCIAL  [FIDUCIAL-MICRO]  97.16,49.4 0 top
JP2  FIDUCIALUFIDUCIAL  [FIDUCIAL-MICRO]  55.24,7.49 0 top
JP3  FIDUCIALUFIDUCIAL  [FIDUCIAL-MICRO]  97.16,49.4 0 bottom
JP4  FIDUCIALUFIDUCIAL  [FIDUCIAL-MICRO]  55.24,7.49 0 bottom
JP5  JUMPER-SMT_3_NO_SILK  [SMT-JUMPER_3_NO_SILK]  20.32,15.75 0 top
JP6  JUMPER-SMT_3_NO_SILK  [SMT-JUMPER_3_NO_SILK]  66.04,15.75 0 top
JP7  FIDUCIALUFIDUCIAL  [FIDUCIAL-MICRO]  142.88,49.4 0 top
JP8  FIDUCIALUFIDUCIAL  [FIDUCIAL-MICRO]  100.97,7.49 0 top
JP9  FIDUCIALUFIDUCIAL  [FIDUCIAL-MICRO]  142.88,49.4 0 bottom
JP10  FIDUCIALUFIDUCIAL  [FIDUCIAL-MICRO]  100.97,7.49 0 bottom
JP11  JUMPER-SMT_3_NO_SILK  [SMT-JUMPER_3_NO_SILK]  111.76,15.75 0 top
JP12  FIDUCIALUFIDUCIAL  [FIDUCIAL-MICRO]  188.6,49.4 0 top
JP13  FIDUCIALUFIDUCIAL  [FIDUCIAL-MICRO]  146.69,7.49 0 top
JP14  FIDUCIALUFIDUCIAL  [FIDUCIAL-MICRO]  188.6,49.4 0 bottom
JP15  FIDUCIALUFIDUCIAL  [FIDUCIAL-MICRO]  146.69,7.49 0 bottom
JP16  JUMPER-SMT_3_NO_SILK  [SMT-JUMPER_3_NO_SILK]  157.48,15.75 0 top
JP17  FIDUCIALUFIDUCIAL  [FIDUCIAL-MICRO]  51.44,93.09 0 top
JP18  FIDUCIALUFIDUCIAL  [FIDUCIAL-MICRO]  9.53,51.18 0 top
JP19  FIDUCIALUFIDUCIAL  [FIDUCIAL-MICRO]  51.44,93.09 0 bottom
JP20  FIDUCIALUFIDUCIAL  [FIDUCIAL-MICRO]  9.53,51.18 0 bottom
JP21  FIDUCIALUFIDUCIAL  [FIDUCIAL-MICRO]  51.44,49.4 0 top
JP22  JUMPER-SMT_3_NO_SILK  [SMT-JUMPER_3_NO_SILK]  20.32,59.44 0 top
JP23  FIDUCIALUFIDUCIAL  [FIDUCIAL-MICRO]  97.16,93.09 0 top
JP24  FIDUCIALUFIDUCIAL  [FIDUCIAL-MICRO]  55.24,51.18 0 top
JP25  FIDUCIALUFIDUCIAL  [FIDUCIAL-MICRO]  97.16,93.09 0 bottom
JP26  FIDUCIALUFIDUCIAL  [FIDUCIAL-MICRO]  55.24,51.18 0 bottom
JP27  JUMPER-SMT_3_NO_SILK  [SMT-JUMPER_3_NO_SILK]  66.04,59.44 0 top
JP28  FIDUCIALUFIDUCIAL  [FIDUCIAL-MICRO]  142.88,93.09 0 top
JP29  FIDUCIALUFIDUCIAL  [FIDUCIAL-MICRO]  100.97,51.18 0 top
JP30  FIDUCIALUFIDUCIAL  [FIDUCIAL-MICRO]  142.88,93.09 0 bottom
JP31  FIDUCIALUFIDUCIAL  [FIDUCIAL-MICRO]  100.97,51.18 0 bottom
JP32  JUMPER-SMT_3_NO_SILK  [SMT-JUMPER_3_NO_SILK]  111.76,59.44 0 top
JP33  FIDUCIALUFIDUCIAL  [FIDUCIAL-MICRO]  188.6,93.09 0 top
JP34  FIDUCIALUFIDUCIAL  [FIDUCIAL-MICRO]  146.69,51.18 0 top
JP35  FIDUCIALUFIDUCIAL  [FIDUCIAL-MICRO]  188.6,93.09 0 bottom
JP36  FIDUCIALUFIDUCIAL  [FIDUCIAL-MICRO]  146.69,51.18 0 bottom
JP37  JUMPER-SMT_3_NO_SILK  [SMT-JUMPER_3_NO_SILK]  157.48,59.44 0 top
JP61  FIDUCIALUFIDUCIAL  [FIDUCIAL-MICRO]  9.53,7.49 0 top
JP71  FIDUCIALUFIDUCIAL  [FIDUCIAL-MICRO]  51.44,49.4 0 bottom
JP81  FIDUCIALUFIDUCIAL  [FIDUCIAL-MICRO]  9.53,7.49 0 bottom
LOGO1  OSHW-LOGOMINI  [OSHW-LOGO-MINI]  17.78,10.67 0 bottom
LOGO2  SFE_LOGO_NAME_FLAME.1_INCH  [SFE_LOGO_NAME_FLAME_.1]  30.48,33.53 0 bottom
LOGO3  QWIIC_LOGO_4MM  [QWIIC_4MM]  17.78,43.31 0 top
LOGO4  QWIIC_LOGO_4MM  [QWIIC_4MM]  17.78,13.59 0 top
LOGO5  SFE_LOGO_NAME.1_INCH  [SFE_LOGO_NAME_.1]  37.97,41.27 0 top
LOGO6  OSHW-LOGOMINI  [OSHW-LOGO-MINI]  63.5,10.67 0 bottom
LOGO7  SFE_LOGO_NAME_FLAME.1_INCH  [SFE_LOGO_NAME_FLAME_.1]  76.2,33.53 0 bottom
LOGO8  QWIIC_LOGO_4MM  [QWIIC_4MM]  63.5,13.59 0 top
LOGO9  SFE_LOGO_NAME.1_INCH  [SFE_LOGO_NAME_.1]  83.69,41.27 0 top
LOGO10  QWIIC_LOGO_4MM  [QWIIC_4MM]  63.5,43.31 0 top
LOGO11  OSHW-LOGOMINI  [OSHW-LOGO-MINI]  109.22,10.67 0 bottom
LOGO12  SFE_LOGO_NAME_FLAME.1_INCH  [SFE_LOGO_NAME_FLAME_.1]  121.92,33.53 0 bottom
LOGO13  QWIIC_LOGO_4MM  [QWIIC_4MM]  109.22,13.59 0 top
LOGO14  SFE_LOGO_NAME.1_INCH  [SFE_LOGO_NAME_.1]  129.41,41.27 0 top
LOGO15  QWIIC_LOGO_4MM  [QWIIC_4MM]  109.22,43.31 0 top
LOGO16  OSHW-LOGOMINI  [OSHW-LOGO-MINI]  154.94,10.67 0 bottom
LOGO17  SFE_LOGO_NAME_FLAME.1_INCH  [SFE_LOGO_NAME_FLAME_.1]  167.64,33.53 0 bottom
LOGO18  QWIIC_LOGO_4MM  [QWIIC_4MM]  154.94,13.59 0 top
LOGO19  SFE_LOGO_NAME.1_INCH  [SFE_LOGO_NAME_.1]  175.13,41.27 0 top
LOGO20  QWIIC_LOGO_4MM  [QWIIC_4MM]  154.94,43.31 0 top
LOGO21  OSHW-LOGOMINI  [OSHW-LOGO-MINI]  17.78,54.36 0 bottom
LOGO22  SFE_LOGO_NAME_FLAME.1_INCH  [SFE_LOGO_NAME_FLAME_.1]  30.48,77.22 0 bottom
LOGO23  QWIIC_LOGO_4MM  [QWIIC_4MM]  17.78,57.28 0 top
LOGO24  SFE_LOGO_NAME.1_INCH  [SFE_LOGO_NAME_.1]  37.97,84.96 0 top
LOGO25  QWIIC_LOGO_4MM  [QWIIC_4MM]  17.78,87 0 top
LOGO26  OSHW-LOGOMINI  [OSHW-LOGO-MINI]  63.5,54.36 0 bottom
LOGO27  SFE_LOGO_NAME_FLAME.1_INCH  [SFE_LOGO_NAME_FLAME_.1]  76.2,77.22 0 bottom
LOGO28  QWIIC_LOGO_4MM  [QWIIC_4MM]  63.5,57.28 0 top
LOGO29  SFE_LOGO_NAME.1_INCH  [SFE_LOGO_NAME_.1]  83.69,84.96 0 top
LOGO30  QWIIC_LOGO_4MM  [QWIIC_4MM]  63.5,87 0 top
LOGO31  OSHW-LOGOMINI  [OSHW-LOGO-MINI]  109.22,54.36 0 bottom
LOGO32  SFE_LOGO_NAME_FLAME.1_INCH  [SFE_LOGO_NAME_FLAME_.1]  121.92,77.22 0 bottom
LOGO33  QWIIC_LOGO_4MM  [QWIIC_4MM]  109.22,57.28 0 top
LOGO34  SFE_LOGO_NAME.1_INCH  [SFE_LOGO_NAME_.1]  129.41,84.96 0 top
LOGO35  QWIIC_LOGO_4MM  [QWIIC_4MM]  109.22,87 0 top
LOGO36  OSHW-LOGOMINI  [OSHW-LOGO-MINI]  154.94,54.36 0 bottom
LOGO37  SFE_LOGO_NAME_FLAME.1_INCH  [SFE_LOGO_NAME_FLAME_.1]  167.64,77.22 0 bottom
LOGO38  QWIIC_LOGO_4MM  [QWIIC_4MM]  154.94,57.28 0 top
LOGO39  SFE_LOGO_NAME.1_INCH  [SFE_LOGO_NAME_.1]  175.13,84.96 0 top
LOGO40  QWIIC_LOGO_4MM  [QWIIC_4MM]  154.94,87 0 top
MEAS  JUMPER-COMBO_2_NC_TRACE  [COMBO-JUMPER_2_NC_TRACE]  17.78,25.91 90 bottom
MEAS1  JUMPER-COMBO_2_NC_TRACE  [COMBO-JUMPER_2_NC_TRACE]  63.5,25.91 90 bottom
MEAS2  JUMPER-COMBO_2_NC_TRACE  [COMBO-JUMPER_2_NC_TRACE]  109.22,25.91 90 bottom
MEAS3  JUMPER-COMBO_2_NC_TRACE  [COMBO-JUMPER_2_NC_TRACE]  154.94,25.91 90 bottom
MEAS4  JUMPER-COMBO_2_NC_TRACE  [COMBO-JUMPER_2_NC_TRACE]  17.78,69.6 90 bottom
MEAS5  JUMPER-COMBO_2_NC_TRACE  [COMBO-JUMPER_2_NC_TRACE]  63.5,69.6 90 bottom
MEAS6  JUMPER-COMBO_2_NC_TRACE  [COMBO-JUMPER_2_NC_TRACE]  109.22,69.6 90 bottom
MEAS7  JUMPER-COMBO_2_NC_TRACE  [COMBO-JUMPER_2_NC_TRACE]  154.94,69.6 90 bottom
PPS1  JUMPER-SMT_2_NC_TRACE_SILK  [SMT-JUMPER_2_NC_TRACE_SILK]  40.64,25.91 0 bottom
PPS2  JUMPER-SMT_2_NC_TRACE_SILK  [SMT-JUMPER_2_NC_TRACE_SILK]  40.64,18.29 180 bottom
PPS3  JUMPER-SMT_2_NC_TRACE_SILK  [SMT-JUMPER_2_NC_TRACE_SILK]  86.36,25.91 0 bottom
PPS4  JUMPER-SMT_2_NC_TRACE_SILK  [SMT-JUMPER_2_NC_TRACE_SILK]  86.36,18.29 180 bottom
PPS5  JUMPER-SMT_2_NC_TRACE_SILK  [SMT-JUMPER_2_NC_TRACE_SILK]  132.08,25.91 0 bottom
PPS6  JUMPER-SMT_2_NC_TRACE_SILK  [SMT-JUMPER_2_NC_TRACE_SILK]  132.08,18.29 180 bottom
PPS7  JUMPER-SMT_2_NC_TRACE_SILK  [SMT-JUMPER_2_NC_TRACE_SILK]  177.8,25.91 0 bottom
PPS8  JUMPER-SMT_2_NC_TRACE_SILK  [SMT-JUMPER_2_NC_TRACE_SILK]  177.8,18.29 180 bottom
PPS9  JUMPER-SMT_2_NC_TRACE_SILK  [SMT-JUMPER_2_NC_TRACE_SILK]  40.64,69.6 0 bottom
PPS10  JUMPER-SMT_2_NC_TRACE_SILK  [SMT-JUMPER_2_NC_TRACE_SILK]  40.64,61.98 180 bottom
PPS11  JUMPER-SMT_2_NC_TRACE_SILK  [SMT-JUMPER_2_NC_TRACE_SILK]  86.36,69.6 0 bottom
PPS12  JUMPER-SMT_2_NC_TRACE_SILK  [SMT-JUMPER_2_NC_TRACE_SILK]  86.36,61.98 180 bottom
PPS13  JUMPER-SMT_2_NC_TRACE_SILK  [SMT-JUMPER_2_NC_TRACE_SILK]  132.08,69.6 0 bottom
PPS14  JUMPER-SMT_2_NC_TRACE_SILK  [SMT-JUMPER_2_NC_TRACE_SILK]  132.08,61.98 180 bottom
PPS15  JUMPER-SMT_2_NC_TRACE_SILK  [SMT-JUMPER_2_NC_TRACE_SILK]  177.8,69.6 0 bottom
PPS16  JUMPER-SMT_2_NC_TRACE_SILK  [SMT-JUMPER_2_NC_TRACE_SILK]  177.8,61.98 180 bottom
PWR  JUMPER-SMT_2_NC_TRACE_SILK  [SMT-JUMPER_2_NC_TRACE_SILK]  20.32,25.91 90 bottom
PWR1  JUMPER-SMT_2_NC_TRACE_SILK  [SMT-JUMPER_2_NC_TRACE_SILK]  66.04,25.91 90 bottom
PWR2  JUMPER-SMT_2_NC_TRACE_SILK  [SMT-JUMPER_2_NC_TRACE_SILK]  111.76,25.91 90 bottom
PWR3  JUMPER-SMT_2_NC_TRACE_SILK  [SMT-JUMPER_2_NC_TRACE_SILK]  157.48,25.91 90 bottom
PWR4  JUMPER-SMT_2_NC_TRACE_SILK  [SMT-JUMPER_2_NC_TRACE_SILK]  20.32,69.6 90 bottom
PWR5  JUMPER-SMT_2_NC_TRACE_SILK  [SMT-JUMPER_2_NC_TRACE_SILK]  66.04,69.6 90 bottom
PWR6  JUMPER-SMT_2_NC_TRACE_SILK  [SMT-JUMPER_2_NC_TRACE_SILK]  111.76,69.6 90 bottom
PWR7  JUMPER-SMT_2_NC_TRACE_SILK  [SMT-JUMPER_2_NC_TRACE_SILK]  157.48,69.6 90 bottom
R1  3.3K  [0402-TIGHT]  20.32,27.18 90 top
R2  33  [1206_RA]  29.21,14.48 180 top
R3  33  [1206_RA]  34.29,14.48 180 top
R4  33  [1206_RA]  29.21,42.42 0 top
R5  27OHM  [0402-TIGHT]  68.58,18.92 0 top
R6  27OHM  [0402-TIGHT]  68.58,20.83 0 top
R7  10Ω  [0402-TIGHT]  89.66,32.64 90 top
R8  100k  [0402-TIGHT]  68.58,22.73 0 top
R9  33  [1206_RA]  39.37,14.48 180 top
R10  1k  [0402-TIGHT]  15.24,25.27 0 top
R11  1k  [0402-TIGHT]  45.72,43.05 180 top
R12  1k  [0402-TIGHT]  43.18,15.75 180 top
R13  1k  [0402-TIGHT]  43.18,14.48 180 top
R14  10Ω  [0402-TIGHT]  43.94,32.64 90 top
R15  100k  [0402-TIGHT]  22.86,22.73 0 top
R16  5.1k  [0402-TIGHT]  12.07,13.84 0 top
R17  5.1k  [0402-TIGHT]  12.07,25.27 0 top
R18  5.1k  [0402-TIGHT]  57.79,13.84 0 top
R19  2.2k  [0402-TIGHT]  22.86,15.75 90 top
R20  2.2k  [0402-TIGHT]  17.78,15.75 90 top
R21  5.1k  [0402-TIGHT]  57.79,25.27 0 top
R22  33  [1206_RA]  74.93,14.48 180 top
R23  33  [1206_RA]  80.01,14.48 180 top
R24  33  [1206_RA]  85.09,14.48 180 top
R25  33  [1206_RA]  74.93,42.42 0 top
R26  1k  [0402-TIGHT]  91.44,43.05 180 top
R27  27OHM  [0402-TIGHT]  22.86,18.92 0 top
R28  27OHM  [0402-TIGHT]  22.86,20.83 0 top
R29  1k  [0402-TIGHT]  60.96,25.27 0 top
R30  1k  [0402-TIGHT]  88.9,15.75 180 top
R31  1k  [0402-TIGHT]  88.9,14.48 180 top
R32  3.3K  [0402-TIGHT]  66.04,27.18 90 top
R33  2.2k  [0402-TIGHT]  68.58,15.75 90 top
R34  2.2k  [0402-TIGHT]  63.5,15.75 90 top
R35  27OHM  [0402-TIGHT]  114.3,18.92 0 top
R36  27OHM  [0402-TIGHT]  114.3,20.83 0 top
R37  10Ω  [0402-TIGHT]  135.38,32.64 90 top
R38  100k  [0402-TIGHT]  114.3,22.73 0 top
R39  5.1k  [0402-TIGHT]  103.5,13.84 0 top
R40  5.1k  [0402-TIGHT]  103.5,25.27 0 top
R41  33  [1206_RA]  120.65,14.48 180 top
R42  33  [1206_RA]  125.73,14.48 180 top
R43  33  [1206_RA]  130.81,14.48 180 top
R44  33  [1206_RA]  120.65,42.42 0 top
R45  1k  [0402-TIGHT]  137.16,43.05 180 top
R46  1k  [0402-TIGHT]  106.68,25.27 0 top
R47  1k  [0402-TIGHT]  134.62,15.75 180 top
R48  1k  [0402-TIGHT]  134.62,14.48 180 top
R49  3.3K  [0402-TIGHT]  111.76,27.18 90 top
R50  2.2k  [0402-TIGHT]  114.3,15.75 90 top
R51  2.2k  [0402-TIGHT]  109.22,15.75 90 top
R52  27OHM  [0402-TIGHT]  160.02,18.92 0 top
R53  27OHM  [0402-TIGHT]  160.02,20.83 0 top
R54  10Ω  [0402-TIGHT]  181.1,32.64 90 top
R55  100k  [0402-TIGHT]  160.02,22.73 0 top
R56  5.1k  [0402-TIGHT]  149.23,13.84 0 top
R57  5.1k  [0402-TIGHT]  149.23,25.27 0 top
R58  33  [1206_RA]  166.37,14.48 180 top
R59  33  [1206_RA]  171.45,14.48 180 top
R60  33  [1206_RA]  176.53,14.48 180 top
R61  33  [1206_RA]  166.37,42.42 0 top
R62  1k  [0402-TIGHT]  182.88,43.05 180 top
R63  1k  [0402-TIGHT]  152.4,25.27 0 top
R64  1k  [0402-TIGHT]  180.34,15.75 180 top
R65  1k  [0402-TIGHT]  180.34,14.48 180 top
R66  3.3K  [0402-TIGHT]  157.48,27.18 90 top
R67  2.2k  [0402-TIGHT]  160.02,15.75 90 top
R68  2.2k  [0402-TIGHT]  154.94,15.75 90 top
R69  27OHM  [0402-TIGHT]  22.86,62.61 0 top
R70  27OHM  [0402-TIGHT]  22.86,64.52 0 top
R71  10Ω  [0402-TIGHT]  43.94,76.33 90 top
R72  100k  [0402-TIGHT]  22.86,66.42 0 top
R73  5.1k  [0402-TIGHT]  12.07,57.53 0 top
R74  5.1k  [0402-TIGHT]  12.07,68.96 0 top
R75  33  [1206_RA]  29.21,58.17 180 top
R76  33  [1206_RA]  34.29,58.17 180 top
R77  33  [1206_RA]  39.37,58.17 180 top
R78  33  [1206_RA]  29.21,86.11 0 top
R79  1k  [0402-TIGHT]  45.72,86.74 180 top
R80  1k  [0402-TIGHT]  15.24,68.96 0 top
R81  1k  [0402-TIGHT]  43.18,59.44 180 top
R82  1k  [0402-TIGHT]  43.18,58.17 180 top
R83  3.3K  [0402-TIGHT]  20.32,70.87 90 top
R84  2.2k  [0402-TIGHT]  22.86,59.44 90 top
R85  2.2k  [0402-TIGHT]  17.78,59.44 90 top
R86  27OHM  [0402-TIGHT]  68.58,62.61 0 top
R87  27OHM  [0402-TIGHT]  68.58,64.52 0 top
R88  10Ω  [0402-TIGHT]  89.66,76.33 90 top
R89  100k  [0402-TIGHT]  68.58,66.42 0 top
R90  5.1k  [0402-TIGHT]  57.79,57.53 0 top
R91  5.1k  [0402-TIGHT]  57.79,68.96 0 top
R92  33  [1206_RA]  74.93,58.17 180 top
R93  33  [1206_RA]  80.01,58.17 180 top
R94  33  [1206_RA]  85.09,58.17 180 top
R95  33  [1206_RA]  74.93,86.11 0 top
R96  1k  [0402-TIGHT]  91.44,86.74 180 top
R97  1k  [0402-TIGHT]  60.96,68.96 0 top
R98  1k  [0402-TIGHT]  88.9,59.44 180 top
R99  1k  [0402-TIGHT]  88.9,58.17 180 top
R100  3.3K  [0402-TIGHT]  66.04,70.87 90 top
R101  2.2k  [0402-TIGHT]  68.58,59.44 90 top
R102  2.2k  [0402-TIGHT]  63.5,59.44 90 top
R103  27OHM  [0402-TIGHT]  114.3,62.61 0 top
R104  27OHM  [0402-TIGHT]  114.3,64.52 0 top
R105  10Ω  [0402-TIGHT]  135.38,76.33 90 top
R106  100k  [0402-TIGHT]  114.3,66.42 0 top
R107  5.1k  [0402-TIGHT]  103.5,57.53 0 top
R108  5.1k  [0402-TIGHT]  103.5,68.96 0 top
R109  33  [1206_RA]  120.65,58.17 180 top
R110  33  [1206_RA]  125.73,58.17 180 top
R111  33  [1206_RA]  130.81,58.17 180 top
R112  33  [1206_RA]  120.65,86.11 0 top
R113  1k  [0402-TIGHT]  137.16,86.74 180 top
R114  1k  [0402-TIGHT]  106.68,68.96 0 top
R115  1k  [0402-TIGHT]  134.62,59.44 180 top
R116  1k  [0402-TIGHT]  134.62,58.17 180 top
R117  3.3K  [0402-TIGHT]  111.76,70.87 90 top
R118  2.2k  [0402-TIGHT]  114.3,59.44 90 top
R119  2.2k  [0402-TIGHT]  109.22,59.44 90 top
R120  27OHM  [0402-TIGHT]  160.02,62.61 0 top
R121  27OHM  [0402-TIGHT]  160.02,64.52 0 top
R122  10Ω  [0402-TIGHT]  181.1,76.33 90 top
R123  100k  [0402-TIGHT]  160.02,66.42 0 top
R124  5.1k  [0402-TIGHT]  149.23,57.53 0 top
R125  5.1k  [0402-TIGHT]  149.23,68.96 0 top
R126  33  [1206_RA]  166.37,58.17 180 top
R127  33  [1206_RA]  171.45,58.17 180 top
R128  33  [1206_RA]  176.53,58.17 180 top
R129  33  [1206_RA]  166.37,86.11 0 top
R130  1k  [0402-TIGHT]  182.88,86.74 180 top
R131  1k  [0402-TIGHT]  152.4,68.96 0 top
R132  1k  [0402-TIGHT]  180.34,59.44 180 top
R133  1k  [0402-TIGHT]  180.34,58.17 180 top
R134  3.3K  [0402-TIGHT]  157.48,70.87 90 top
R135  2.2k  [0402-TIGHT]  160.02,59.44 90 top
R136  2.2k  [0402-TIGHT]  154.94,59.44 90 top
TP1  JUMPER-SMT_2_NC_TRACE_SILK  [SMT-JUMPER_2_NC_TRACE_SILK]  40.64,23.37 0 bottom
TP2  JUMPER-SMT_2_NC_TRACE_SILK  [SMT-JUMPER_2_NC_TRACE_SILK]  40.64,20.83 180 bottom
TP3  JUMPER-SMT_2_NC_TRACE_SILK  [SMT-JUMPER_2_NC_TRACE_SILK]  86.36,23.37 0 bottom
TP4  JUMPER-SMT_2_NC_TRACE_SILK  [SMT-JUMPER_2_NC_TRACE_SILK]  86.36,20.83 180 bottom
TP5  JUMPER-SMT_2_NC_TRACE_SILK  [SMT-JUMPER_2_NC_TRACE_SILK]  132.08,23.37 0 bottom
TP6  JUMPER-SMT_2_NC_TRACE_SILK  [SMT-JUMPER_2_NC_TRACE_SILK]  132.08,20.83 180 bottom
TP7  JUMPER-SMT_2_NC_TRACE_SILK  [SMT-JUMPER_2_NC_TRACE_SILK]  177.8,23.37 0 bottom
TP8  JUMPER-SMT_2_NC_TRACE_SILK  [SMT-JUMPER_2_NC_TRACE_SILK]  177.8,20.83 180 bottom
TP9  JUMPER-SMT_2_NC_TRACE_SILK  [SMT-JUMPER_2_NC_TRACE_SILK]  40.64,67.06 0 bottom
TP10  JUMPER-SMT_2_NC_TRACE_SILK  [SMT-JUMPER_2_NC_TRACE_SILK]  40.64,64.52 180 bottom
TP11  JUMPER-SMT_2_NC_TRACE_SILK  [SMT-JUMPER_2_NC_TRACE_SILK]  86.36,67.06 0 bottom
TP12  JUMPER-SMT_2_NC_TRACE_SILK  [SMT-JUMPER_2_NC_TRACE_SILK]  86.36,64.52 180 bottom
TP13  JUMPER-SMT_2_NC_TRACE_SILK  [SMT-JUMPER_2_NC_TRACE_SILK]  132.08,67.06 0 bottom
TP14  JUMPER-SMT_2_NC_TRACE_SILK  [SMT-JUMPER_2_NC_TRACE_SILK]  132.08,64.52 180 bottom
TP15  JUMPER-SMT_2_NC_TRACE_SILK  [SMT-JUMPER_2_NC_TRACE_SILK]  177.8,67.06 0 bottom
TP16  JUMPER-SMT_2_NC_TRACE_SILK  [SMT-JUMPER_2_NC_TRACE_SILK]  177.8,64.52 180 bottom
U1  U-BLOX_ZED_F9T  [ZED-F9X]  80.01,28.45 90 top
U2  AP2112K-3.3V  [SOT23-5]  67.31,30.99 270 top
U3  U-BLOX_ZED_F9T  [ZED-F9X]  34.29,28.45 90 top
U4  U-BLOX_ZED_F9T  [ZED-F9X]  125.73,28.45 90 top
U5  AP2112K-3.3V  [SOT23-5]  21.59,30.99 270 top
U6  AP2112K-3.3V  [SOT23-5]  113.03,30.99 270 top
U7  U-BLOX_ZED_F9T  [ZED-F9X]  171.45,28.45 90 top
U8  AP2112K-3.3V  [SOT23-5]  158.75,30.99 270 top
U9  U-BLOX_ZED_F9T  [ZED-F9X]  34.29,72.14 90 top
U10  AP2112K-3.3V  [SOT23-5]  21.59,74.68 270 top
U11  U-BLOX_ZED_F9T  [ZED-F9X]  80.01,72.14 90 top
U12  AP2112K-3.3V  [SOT23-5]  67.31,74.68 270 top
U13  U-BLOX_ZED_F9T  [ZED-F9X]  125.73,72.14 90 top
U14  AP2112K-3.3V  [SOT23-5]  113.03,74.68 270 top
U15  U-BLOX_ZED_F9T  [ZED-F9X]  171.45,72.14 90 top
U16  AP2112K-3.3V  [SOT23-5]  158.75,74.68 270 top
U$1  [#3#3V#0]  27.94,45.97 90 top
U$2  [L1#L20]  89.53,28.45 90 top
U$3  [#5V#1]  25.4,46.61 90 top
U$4  [#GND#2]  22.86,46.1 90 top
U$5  [##CS##4]  35.56,46.61 90 top
U$6  [L1#L20]  43.81,28.45 90 top
U$7  [TIME0]  43.81,18.29 90 top
U$8  [##CS##4]  35.56,46.61 90 bottom
U$9  [#CIPO#6]  40.64,45.72 90 top
U$10  [#CIPO#6]  40.64,45.72 90 bottom
U$11  [#COPI#5]  38.1,45.59 90 top
U$12  [#COPI#5]  38.1,45.59 90 bottom
U$13  [ACTIVE1]  45.21,26.8 90 top
U$14  [#RX2#1]  33.02,45.97 90 top
U$15  [##RST##0]  33.02,10.92 90 top
U$16  [#RX2#1]  33.02,45.97 90 bottom
U$17  [#SCL#3]  30.48,10.79 90 bottom
U$18  [#SDA#2]  27.94,11.05 90 top
U$19  [PULSE1]  45.21,17.65 90 top
U$20  [12]  45.21,41.02 90 top
U$21  [TIME0]  43.81,38.61 90 top
U$22  [#SDA#2]  27.94,11.05 90 bottom
U$23  [#TX2#0]  30.48,45.97 90 top
U$24  [#TX2#0]  30.48,45.97 90 bottom
U$25  [PULSE1]  45.21,37.97 90 top
U$26  [20]  45.21,20.83 90 top
U$27  [#GND#2]  22.86,46.1 90 bottom
U$28  [#5V#1]  25.4,46.61 90 bottom
U$29  [#3#3V#0]  27.94,45.97 90 bottom
U$30  [#SCK#5]  43.18,46.1 90 top
U$31  [ANT1]  45.21,31.37 90 top
U$32  [#_TX2#0]  13.46,39.88 0 top
U$33  [#D_SEL#1]  42.67,41.91 90 bottom
U$34  [ZED#F9T0]  21.08,39.88 0 top
U$35  [#3#3V#0]  25.4,11.05 90 bottom
U$36  [#3#3V#0]  25.4,11.05 90 top
U$37  [##RST##0]  33.02,10.92 90 bottom
U$38  [#GND#2]  22.86,10.79 90 bottom
U$39  [#GND#2]  22.86,10.79 90 top
U$40  [GNSS0]  33.53,30.99 0 bottom
U$41  [##SAFE##1]  35.56,11.43 90 bottom
U$42  [#INT#2]  38.1,10.54 90 top
U$43  [#INT#2]  38.1,10.54 90 bottom
U$44  [#FENCE#0]  45.72,11.43 90 bottom
U$45  [#TP2_LED#0]  35.56,18.29 0 bottom
U$46  [#TP1#3]  40.64,10.67 90 top
U$47  [#TP1#3]  40.64,10.67 90 bottom
U$48  [#TP2#4]  43.18,10.79 90 top
U$49  [#TP2#4]  43.18,10.79 90 bottom
U$50  [#TP2#0]  37.59,20.83 0 bottom
U$51  [#_FENCE#0]  36.58,15.75 0 bottom
U$52  [#TP1#0]  37.72,23.37 0 bottom
U$53  [#SCL#3]  30.48,10.79 90 top
U$54  [#TP1_LED#0]  35.69,25.91 0 bottom
U$55  [#_RX2#0]  13.46,37.34 0 top
U$56  [PWR0]  11.56,27.18 0 top
U$57  [#PWR#0]  20.32,22.73 90 bottom
U$58  [#RX2_#0]  13.46,37.34 0 bottom
U$59  [#3#3V#0]  13.46,34.8 0 bottom
U$60  [#3#3V#0]  13.46,34.8 0 top
U$61  [#GND#2]  13.34,29.72 0 bottom
U$62  [#GND#2]  13.34,29.72 0 top
U$63  [TP10]  48.26,44.32 0 top
U$64  [TP21]  48.39,23.88 0 top
U$65  [#FENCE#0]  45.72,11.43 90 top
U$66  [#TX2_#0]  13.46,39.88 0 bottom
U$67  [#TX_RDY#0]  44.45,41.4 90 bottom
U$68  [#MEAS#0]  17.78,21.46 90 bottom
U$69  [#I�C#0]  20.32,17.78 0 top
U$70  [GNSS0]  17.78,41.66 0 top
U$71  [TIME1]  24,41.66 0 top
U$72  [##SAFE##0]  35.56,10.92 90 top
U$73  [RTCM0]  11.18,44.58 0 top
U$74  [TIME1]  27.18,30.99 0 bottom
U$75  [CORRECTION1]  15.88,42.16 0 bottom
U$76  [RTCM_0]  15.75,43.43 0 bottom
U$77  [ZED#F9T0]  30.48,28.45 0 bottom
U$78  [FEN0]  48.26,11.81 0 top
U$79  [ACTIVE1]  90.93,26.8 90 top
U$80  [TIME0]  89.53,18.29 90 top
U$81  [PULSE1]  90.93,17.65 90 top
U$82  [12]  90.93,41.02 90 top
U$83  [TIME0]  89.53,38.61 90 top
U$84  [PULSE1]  90.93,37.97 90 top
U$85  [20]  90.93,20.83 90 top
U$86  [ANT1]  90.93,31.37 90 top
U$87  [#SCL#3]  76.2,10.79 90 top
U$88  [#3#3V#0]  73.66,45.97 90 top
U$89  [#5V#1]  71.12,46.61 90 top
U$90  [#GND#2]  68.58,46.1 90 top
U$91  [##CS##4]  81.28,46.61 90 top
U$92  [##CS##4]  81.28,46.61 90 bottom
U$93  [#CIPO#6]  86.36,45.72 90 top
U$94  [#CIPO#6]  86.36,45.72 90 bottom
U$95  [#COPI#5]  83.82,45.59 90 top
U$96  [#COPI#5]  83.82,45.59 90 bottom
U$97  [#RX2#1]  78.74,45.97 90 top
U$98  [#RX2#1]  78.74,45.97 90 bottom
U$99  [#SCL#3]  76.2,10.79 90 bottom
U$100  [#SDA#2]  73.66,11.05 90 top
U$101  [#SDA#2]  73.66,11.05 90 bottom
U$102  [#TX2#0]  76.2,45.97 90 top
U$103  [#TX2#0]  76.2,45.97 90 bottom
U$104  [#GND#2]  68.58,46.1 90 bottom
U$105  [#5V#1]  71.12,46.61 90 bottom
U$106  [#3#3V#0]  73.66,45.97 90 bottom
U$107  [#SCK#5]  88.9,46.1 90 top
U$108  [#3#3V#0]  71.12,11.05 90 bottom
U$109  [#3#3V#0]  71.12,11.05 90 top
U$110  [#GND#2]  68.58,10.79 90 bottom
U$111  [#GND#2]  68.58,10.79 90 top
U$112  [##RST##0]  78.74,10.92 90 top
U$113  [##RST##0]  78.74,10.92 90 bottom
U$114  [##SAFE##1]  81.28,11.43 90 bottom
U$115  [#INT#2]  83.82,10.54 90 top
U$116  [#INT#2]  83.82,10.54 90 bottom
U$117  [#TP1#3]  86.36,10.67 90 top
U$118  [#TP1#3]  86.36,10.67 90 bottom
U$119  [#TP2#4]  88.9,10.79 90 top
U$120  [#TP2#4]  88.9,10.79 90 bottom
U$121  [#FENCE#0]  91.44,11.43 90 bottom
U$122  [#_FENCE#0]  82.3,15.75 0 bottom
U$123  [#TP2#0]  83.31,20.83 0 bottom
U$124  [#TP1#0]  83.44,23.37 0 bottom
U$125  [#TP1_LED#0]  81.41,25.91 0 bottom
U$126  [#TP2_LED#0]  81.28,18.29 0 bottom
U$127  [#3#3V#0]  59.18,34.8 0 bottom
U$128  [#3#3V#0]  59.18,34.8 0 top
U$129  [#GND#2]  59.05,29.72 0 bottom
U$130  [#GND#2]  59.05,29.72 0 top
U$131  [TP10]  93.98,44.32 0 top
U$132  [TP21]  94.11,23.88 0 top
U$133  [#FENCE#0]  91.44,11.43 90 top
U$134  [#TX_RDY#0]  90.17,41.4 90 bottom
U$135  [#D_SEL#1]  88.39,41.91 90 bottom
U$136  [#_TX2#0]  59.18,39.88 0 top
U$137  [PWR0]  57.28,27.18 0 top
U$138  [#PWR#0]  66.04,22.73 90 bottom
U$139  [#_RX2#0]  59.18,37.34 0 top
U$140  [#RX2_#0]  59.18,37.34 0 bottom
U$141  [#TX2_#0]  59.18,39.88 0 bottom
U$142  [#MEAS#0]  63.5,21.46 90 bottom
U$143  [#I�C#0]  66.04,17.78 0 top
U$144  [GNSS0]  63.5,41.66 0 top
U$145  [TIME1]  69.72,41.66 0 top
U$146  [ZED#F9T0]  66.8,39.88 0 top
U$147  [##SAFE##0]  81.28,10.92 90 top
U$148  [RTCM0]  56.9,44.58 0 top
U$149  [CORRECTION1]  61.59,42.16 0 bottom
U$150  [RTCM_0]  61.47,43.43 0 bottom
U$151  [GNSS0]  79.25,30.99 0 bottom
U$152  [TIME1]  72.9,30.99 0 bottom
U$153  [ZED#F9T0]  76.2,28.45 0 bottom
U$154  [FEN0]  93.98,11.81 0 top
U$155  [L1#L20]  135.25,28.45 90 top
U$156  [ACTIVE1]  136.65,26.8 90 top
U$157  [TIME0]  135.25,18.29 90 top
U$158  [PULSE1]  136.65,17.65 90 top
U$159  [12]  136.65,41.02 90 top
U$160  [TIME0]  135.25,38.61 90 top
U$161  [PULSE1]  136.65,37.97 90 top
U$162  [20]  136.65,20.83 90 top
U$163  [ANT1]  136.65,31.37 90 top
U$164  [#SCL#3]  121.92,10.79 90 top
U$165  [#3#3V#0]  119.38,45.97 90 top
U$166  [#5V#1]  116.84,46.61 90 top
U$167  [#GND#2]  114.3,46.1 90 top
U$168  [##CS##4]  127,46.61 90 top
U$169  [##CS##4]  127,46.61 90 bottom
U$170  [#CIPO#6]  132.08,45.72 90 top
U$171  [#CIPO#6]  132.08,45.72 90 bottom
U$172  [#COPI#5]  129.54,45.59 90 top
U$173  [#COPI#5]  129.54,45.59 90 bottom
U$174  [#RX2#1]  124.46,45.97 90 top
U$175  [#RX2#1]  124.46,45.97 90 bottom
U$176  [#SCL#3]  121.92,10.79 90 bottom
U$177  [#SDA#2]  119.38,11.05 90 top
U$178  [#SDA#2]  119.38,11.05 90 bottom
U$179  [#TX2#0]  121.92,45.97 90 top
U$180  [#TX2#0]  121.92,45.97 90 bottom
U$181  [#GND#2]  114.3,46.1 90 bottom
U$182  [#5V#1]  116.84,46.61 90 bottom
U$183  [#3#3V#0]  119.38,45.97 90 bottom
U$184  [#SCK#5]  134.62,46.1 90 top
U$185  [#3#3V#0]  116.84,11.05 90 bottom
U$186  [#3#3V#0]  116.84,11.05 90 top
U$187  [#GND#2]  114.3,10.79 90 bottom
U$188  [#GND#2]  114.3,10.79 90 top
U$189  [##RST##0]  124.46,10.92 90 top
U$190  [##RST##0]  124.46,10.92 90 bottom
U$191  [##SAFE##1]  127,11.43 90 bottom
U$192  [#INT#2]  129.54,10.54 90 top
U$193  [#INT#2]  129.54,10.54 90 bottom
U$194  [#TP1#3]  132.08,10.67 90 top
U$195  [#TP1#3]  132.08,10.67 90 bottom
U$196  [#TP2#4]  134.62,10.79 90 top
U$197  [#TP2#4]  134.62,10.79 90 bottom
U$198  [#FENCE#0]  137.16,11.43 90 bottom
U$199  [#_FENCE#0]  128.02,15.75 0 bottom
U$200  [#TP2#0]  129.03,20.83 0 bottom
U$201  [#TP1#0]  129.16,23.37 0 bottom
U$202  [#TP1_LED#0]  127.13,25.91 0 bottom
U$203  [#TP2_LED#0]  127,18.29 0 bottom
U$204  [#3#3V#0]  104.9,34.8 0 bottom
U$205  [#3#3V#0]  104.9,34.8 0 top
U$206  [#GND#2]  104.78,29.72 0 bottom
U$207  [#GND#2]  104.78,29.72 0 top
U$208  [TP10]  139.7,44.32 0 top
U$209  [TP21]  139.83,23.88 0 top
U$210  [#FENCE#0]  137.16,11.43 90 top
U$211  [#TX_RDY#0]  135.89,41.4 90 bottom
U$212  [#D_SEL#1]  134.11,41.91 90 bottom
U$213  [#_TX2#0]  104.9,39.88 0 top
U$214  [PWR0]  103,27.18 0 top
U$215  [#PWR#0]  111.76,22.73 90 bottom
U$216  [#_RX2#0]  104.9,37.34 0 top
U$217  [#RX2_#0]  104.9,37.34 0 bottom
U$218  [#TX2_#0]  104.9,39.88 0 bottom
U$219  [#MEAS#0]  109.22,21.46 90 bottom
U$220  [#I�C#0]  111.76,17.78 0 top
U$221  [GNSS0]  109.22,41.66 0 top
U$222  [TIME1]  115.44,41.66 0 top
U$223  [ZED#F9T0]  112.52,39.88 0 top
U$224  [##SAFE##0]  127,10.92 90 top
U$225  [RTCM0]  102.62,44.58 0 top
U$226  [CORRECTION1]  107.31,42.16 0 bottom
U$227  [RTCM_0]  107.19,43.43 0 bottom
U$228  [GNSS0]  124.97,30.99 0 bottom
U$229  [TIME1]  118.62,30.99 0 bottom
U$230  [ZED#F9T0]  121.92,28.45 0 bottom
U$231  [FEN0]  139.7,11.81 0 top
U$232  [L1#L20]  180.98,28.45 90 top
U$233  [ACTIVE1]  182.37,26.8 90 top
U$234  [TIME0]  180.98,18.29 90 top
U$235  [PULSE1]  182.37,17.65 90 top
U$236  [12]  182.37,41.02 90 top
U$237  [TIME0]  180.98,38.61 90 top
U$238  [PULSE1]  182.37,37.97 90 top
U$239  [20]  182.37,20.83 90 top
U$240  [ANT1]  182.37,31.37 90 top
U$241  [#SCL#3]  167.64,10.79 90 top
U$242  [#3#3V#0]  165.1,45.97 90 top
U$243  [#5V#1]  162.56,46.61 90 top
U$244  [#GND#2]  160.02,46.1 90 top
U$245  [##CS##4]  172.72,46.61 90 top
U$246  [##CS##4]  172.72,46.61 90 bottom
U$247  [#CIPO#6]  177.8,45.72 90 top
U$248  [#CIPO#6]  177.8,45.72 90 bottom
U$249  [#COPI#5]  175.26,45.59 90 top
U$250  [#COPI#5]  175.26,45.59 90 bottom
U$251  [#RX2#1]  170.18,45.97 90 top
U$252  [#RX2#1]  170.18,45.97 90 bottom
U$253  [#SCL#3]  167.64,10.79 90 bottom
U$254  [#SDA#2]  165.1,11.05 90 top
U$255  [#SDA#2]  165.1,11.05 90 bottom
U$256  [#TX2#0]  167.64,45.97 90 top
U$257  [#TX2#0]  167.64,45.97 90 bottom
U$258  [#GND#2]  160.02,46.1 90 bottom
U$259  [#5V#1]  162.56,46.61 90 bottom
U$260  [#3#3V#0]  165.1,45.97 90 bottom
U$261  [#SCK#5]  180.34,46.1 90 top
U$262  [#3#3V#0]  162.56,11.05 90 bottom
U$263  [#3#3V#0]  162.56,11.05 90 top
U$264  [#GND#2]  160.02,10.79 90 bottom
U$265  [#GND#2]  160.02,10.79 90 top
U$266  [##RST##0]  170.18,10.92 90 top
U$267  [##RST##0]  170.18,10.92 90 bottom
U$268  [##SAFE##1]  172.72,11.43 90 bottom
U$269  [#INT#2]  175.26,10.54 90 top
U$270  [#INT#2]  175.26,10.54 90 bottom
U$271  [#TP1#3]  177.8,10.67 90 top
U$272  [#TP1#3]  177.8,10.67 90 bottom
U$273  [#TP2#4]  180.34,10.79 90 top
U$274  [#TP2#4]  180.34,10.79 90 bottom
U$275  [#FENCE#0]  182.88,11.43 90 bottom
U$276  [#_FENCE#0]  173.74,15.75 0 bottom
U$277  [#TP2#0]  174.75,20.83 0 bottom
U$278  [#TP1#0]  174.88,23.37 0 bottom
U$279  [#TP1_LED#0]  172.85,25.91 0 bottom
U$280  [#TP2_LED#0]  172.72,18.29 0 bottom
U$281  [#3#3V#0]  150.62,34.8 0 bottom
U$282  [#3#3V#0]  150.62,34.8 0 top
U$283  [#GND#2]  150.5,29.72 0 bottom
U$284  [#GND#2]  150.5,29.72 0 top
U$285  [TP10]  185.42,44.32 0 top
U$286  [TP21]  185.55,23.88 0 top
U$287  [#FENCE#0]  182.88,11.43 90 top
U$288  [#TX_RDY#0]  181.61,41.4 90 bottom
U$289  [#D_SEL#1]  179.83,41.91 90 bottom
U$290  [#_TX2#0]  150.62,39.88 0 top
U$291  [PWR0]  148.72,27.18 0 top
U$292  [#PWR#0]  157.48,22.73 90 bottom
U$293  [#_RX2#0]  150.62,37.34 0 top
U$294  [#RX2_#0]  150.62,37.34 0 bottom
U$295  [#TX2_#0]  150.62,39.88 0 bottom
U$296  [#MEAS#0]  154.94,21.46 90 bottom
U$297  [#I�C#0]  157.48,17.78 0 top
U$298  [GNSS0]  154.94,41.66 0 top
U$299  [TIME1]  161.16,41.66 0 top
U$300  [ZED#F9T0]  158.24,39.88 0 top
U$301  [##SAFE##0]  172.72,10.92 90 top
U$302  [RTCM0]  148.34,44.58 0 top
U$303  [CORRECTION1]  153.04,42.16 0 bottom
U$304  [RTCM_0]  152.91,43.43 0 bottom
U$305  [GNSS0]  170.69,30.99 0 bottom
U$306  [TIME1]  164.34,30.99 0 bottom
U$307  [ZED#F9T0]  167.64,28.45 0 bottom
U$308  [FEN0]  185.42,11.81 0 top
U$309  [L1#L20]  43.81,72.14 90 top
U$310  [ACTIVE1]  45.21,70.48 90 top
U$311  [TIME0]  43.81,61.98 90 top
U$312  [PULSE1]  45.21,61.34 90 top
U$313  [12]  45.21,84.71 90 top
U$314  [TIME0]  43.81,82.3 90 top
U$315  [PULSE1]  45.21,81.66 90 top
U$316  [20]  45.21,64.52 90 top
U$317  [ANT1]  45.21,75.06 90 top
U$318  [#SCL#3]  30.48,54.48 90 top
U$319  [#3#3V#0]  27.94,89.66 90 top
U$320  [#5V#1]  25.4,90.3 90 top
U$321  [#GND#2]  22.86,89.79 90 top
U$322  [##CS##4]  35.56,90.3 90 top
U$323  [##CS##4]  35.56,90.3 90 bottom
U$324  [#CIPO#6]  40.64,89.41 90 top
U$325  [#CIPO#6]  40.64,89.41 90 bottom
U$326  [#COPI#5]  38.1,89.28 90 top
U$327  [#COPI#5]  38.1,89.28 90 bottom
U$328  [#RX2#1]  33.02,89.66 90 top
U$329  [#RX2#1]  33.02,89.66 90 bottom
U$330  [#SCL#3]  30.48,54.48 90 bottom
U$331  [#SDA#2]  27.94,54.74 90 top
U$332  [#SDA#2]  27.94,54.74 90 bottom
U$333  [#TX2#0]  30.48,89.66 90 top
U$334  [#TX2#0]  30.48,89.66 90 bottom
U$335  [#GND#2]  22.86,89.79 90 bottom
U$336  [#5V#1]  25.4,90.3 90 bottom
U$337  [#3#3V#0]  27.94,89.66 90 bottom
U$338  [#SCK#5]  43.18,89.79 90 top
U$339  [#3#3V#0]  25.4,54.74 90 bottom
U$340  [#3#3V#0]  25.4,54.74 90 top
U$341  [#GND#2]  22.86,54.48 90 bottom
U$342  [#GND#2]  22.86,54.48 90 top
U$343  [##RST##0]  33.02,54.61 90 top
U$344  [##RST##0]  33.02,54.61 90 bottom
U$345  [##SAFE##1]  35.56,55.12 90 bottom
U$346  [#INT#2]  38.1,54.23 90 top
U$347  [#INT#2]  38.1,54.23 90 bottom
U$348  [#TP1#3]  40.64,54.36 90 top
U$349  [#TP1#3]  40.64,54.36 90 bottom
U$350  [#TP2#4]  43.18,54.48 90 top
U$351  [#TP2#4]  43.18,54.48 90 bottom
U$352  [#FENCE#0]  45.72,55.12 90 bottom
U$353  [#_FENCE#0]  36.58,59.44 0 bottom
U$354  [#TP2#0]  37.59,64.52 0 bottom
U$355  [#TP1#0]  37.72,67.06 0 bottom
U$356  [#TP1_LED#0]  35.69,69.6 0 bottom
U$357  [#TP2_LED#0]  35.56,61.98 0 bottom
U$358  [#3#3V#0]  13.46,78.49 0 bottom
U$359  [#3#3V#0]  13.46,78.49 0 top
U$360  [#GND#2]  13.34,73.41 0 bottom
U$361  [#GND#2]  13.34,73.41 0 top
U$362  [TP10]  48.26,88.01 0 top
U$363  [TP21]  48.39,67.56 0 top
U$364  [#FENCE#0]  45.72,55.12 90 top
U$365  [#TX_RDY#0]  44.45,85.09 90 bottom
U$366  [#D_SEL#1]  42.67,85.6 90 bottom
U$367  [#_TX2#0]  13.46,83.57 0 top
U$368  [PWR0]  11.56,70.87 0 top
U$369  [#PWR#0]  20.32,66.42 90 bottom
U$370  [#_RX2#0]  13.46,81.03 0 top
U$371  [#RX2_#0]  13.46,81.03 0 bottom
U$372  [#TX2_#0]  13.46,83.57 0 bottom
U$373  [#MEAS#0]  17.78,65.15 90 bottom
U$374  [#I�C#0]  20.32,61.47 0 top
U$375  [GNSS0]  17.78,85.34 0 top
U$376  [TIME1]  24,85.34 0 top
U$377  [ZED#F9T0]  21.08,83.57 0 top
U$378  [##SAFE##0]  35.56,54.61 90 top
U$379  [RTCM0]  11.18,88.27 0 top
U$380  [CORRECTION1]  15.88,85.85 0 bottom
U$381  [RTCM_0]  15.75,87.12 0 bottom
U$382  [GNSS0]  33.53,74.68 0 bottom
U$383  [TIME1]  27.18,74.68 0 bottom
U$384  [ZED#F9T0]  30.48,72.14 0 bottom
U$385  [FEN0]  48.26,55.5 0 top
U$386  [L1#L20]  89.53,72.14 90 top
U$387  [ACTIVE1]  90.93,70.48 90 top
U$388  [TIME0]  89.53,61.98 90 top
U$389  [PULSE1]  90.93,61.34 90 top
U$390  [12]  90.93,84.71 90 top
U$391  [TIME0]  89.53,82.3 90 top
U$392  [PULSE1]  90.93,81.66 90 top
U$393  [20]  90.93,64.52 90 top
U$394  [ANT1]  90.93,75.06 90 top
U$395  [#SCL#3]  76.2,54.48 90 top
U$396  [#3#3V#0]  73.66,89.66 90 top
U$397  [#5V#1]  71.12,90.3 90 top
U$398  [#GND#2]  68.58,89.79 90 top
U$399  [##CS##4]  81.28,90.3 90 top
U$400  [##CS##4]  81.28,90.3 90 bottom
U$401  [#CIPO#6]  86.36,89.41 90 top
U$402  [#CIPO#6]  86.36,89.41 90 bottom
U$403  [#COPI#5]  83.82,89.28 90 top
U$404  [#COPI#5]  83.82,89.28 90 bottom
U$405  [#RX2#1]  78.74,89.66 90 top
U$406  [#RX2#1]  78.74,89.66 90 bottom
U$407  [#SCL#3]  76.2,54.48 90 bottom
U$408  [#SDA#2]  73.66,54.74 90 top
U$409  [#SDA#2]  73.66,54.74 90 bottom
U$410  [#TX2#0]  76.2,89.66 90 top
U$411  [#TX2#0]  76.2,89.66 90 bottom
U$412  [#GND#2]  68.58,89.79 90 bottom
U$413  [#5V#1]  71.12,90.3 90 bottom
U$414  [#3#3V#0]  73.66,89.66 90 bottom
U$415  [#SCK#5]  88.9,89.79 90 top
U$416  [#3#3V#0]  71.12,54.74 90 bottom
U$417  [#3#3V#0]  71.12,54.74 90 top
U$418  [#GND#2]  68.58,54.48 90 bottom
U$419  [#GND#2]  68.58,54.48 90 top
U$420  [##RST##0]  78.74,54.61 90 top
U$421  [##RST##0]  78.74,54.61 90 bottom
U$422  [##SAFE##1]  81.28,55.12 90 bottom
U$423  [#INT#2]  83.82,54.23 90 top
U$424  [#INT#2]  83.82,54.23 90 bottom
U$425  [#TP1#3]  86.36,54.36 90 top
U$426  [#TP1#3]  86.36,54.36 90 bottom
U$427  [#TP2#4]  88.9,54.48 90 top
U$428  [#TP2#4]  88.9,54.48 90 bottom
U$429  [#FENCE#0]  91.44,55.12 90 bottom
U$430  [#_FENCE#0]  82.3,59.44 0 bottom
U$431  [#TP2#0]  83.31,64.52 0 bottom
U$432  [#TP1#0]  83.44,67.06 0 bottom
U$433  [#TP1_LED#0]  81.41,69.6 0 bottom
U$434  [#TP2_LED#0]  81.28,61.98 0 bottom
U$435  [#3#3V#0]  59.18,78.49 0 bottom
U$436  [#3#3V#0]  59.18,78.49 0 top
U$437  [#GND#2]  59.05,73.41 0 bottom
U$438  [#GND#2]  59.05,73.41 0 top
U$439  [TP10]  93.98,88.01 0 top
U$440  [TP21]  94.11,67.56 0 top
U$441  [#FENCE#0]  91.44,55.12 90 top
U$442  [#TX_RDY#0]  90.17,85.09 90 bottom
U$443  [#D_SEL#1]  88.39,85.6 90 bottom
U$444  [#_TX2#0]  59.18,83.57 0 top
U$445  [PWR0]  57.28,70.87 0 top
U$446  [#PWR#0]  66.04,66.42 90 bottom
U$447  [#_RX2#0]  59.18,81.03 0 top
U$448  [#RX2_#0]  59.18,81.03 0 bottom